# Altium PCB верхняя плата версия 5.PcbDoc (part 1 of 2)
Units mm, origin at the board's own origin, x right, y up, seen from the top; angles counter-clockwise.
Board outline 53 x 45 mm, 4 copper layers (Top Layer, Layer 1, Layer 2, Bottom Layer), stack 1.083 mm thick; 122 components, 141 nets, 822 pads, 327 vias.
Unrouted connection lines stored in the file: 3.
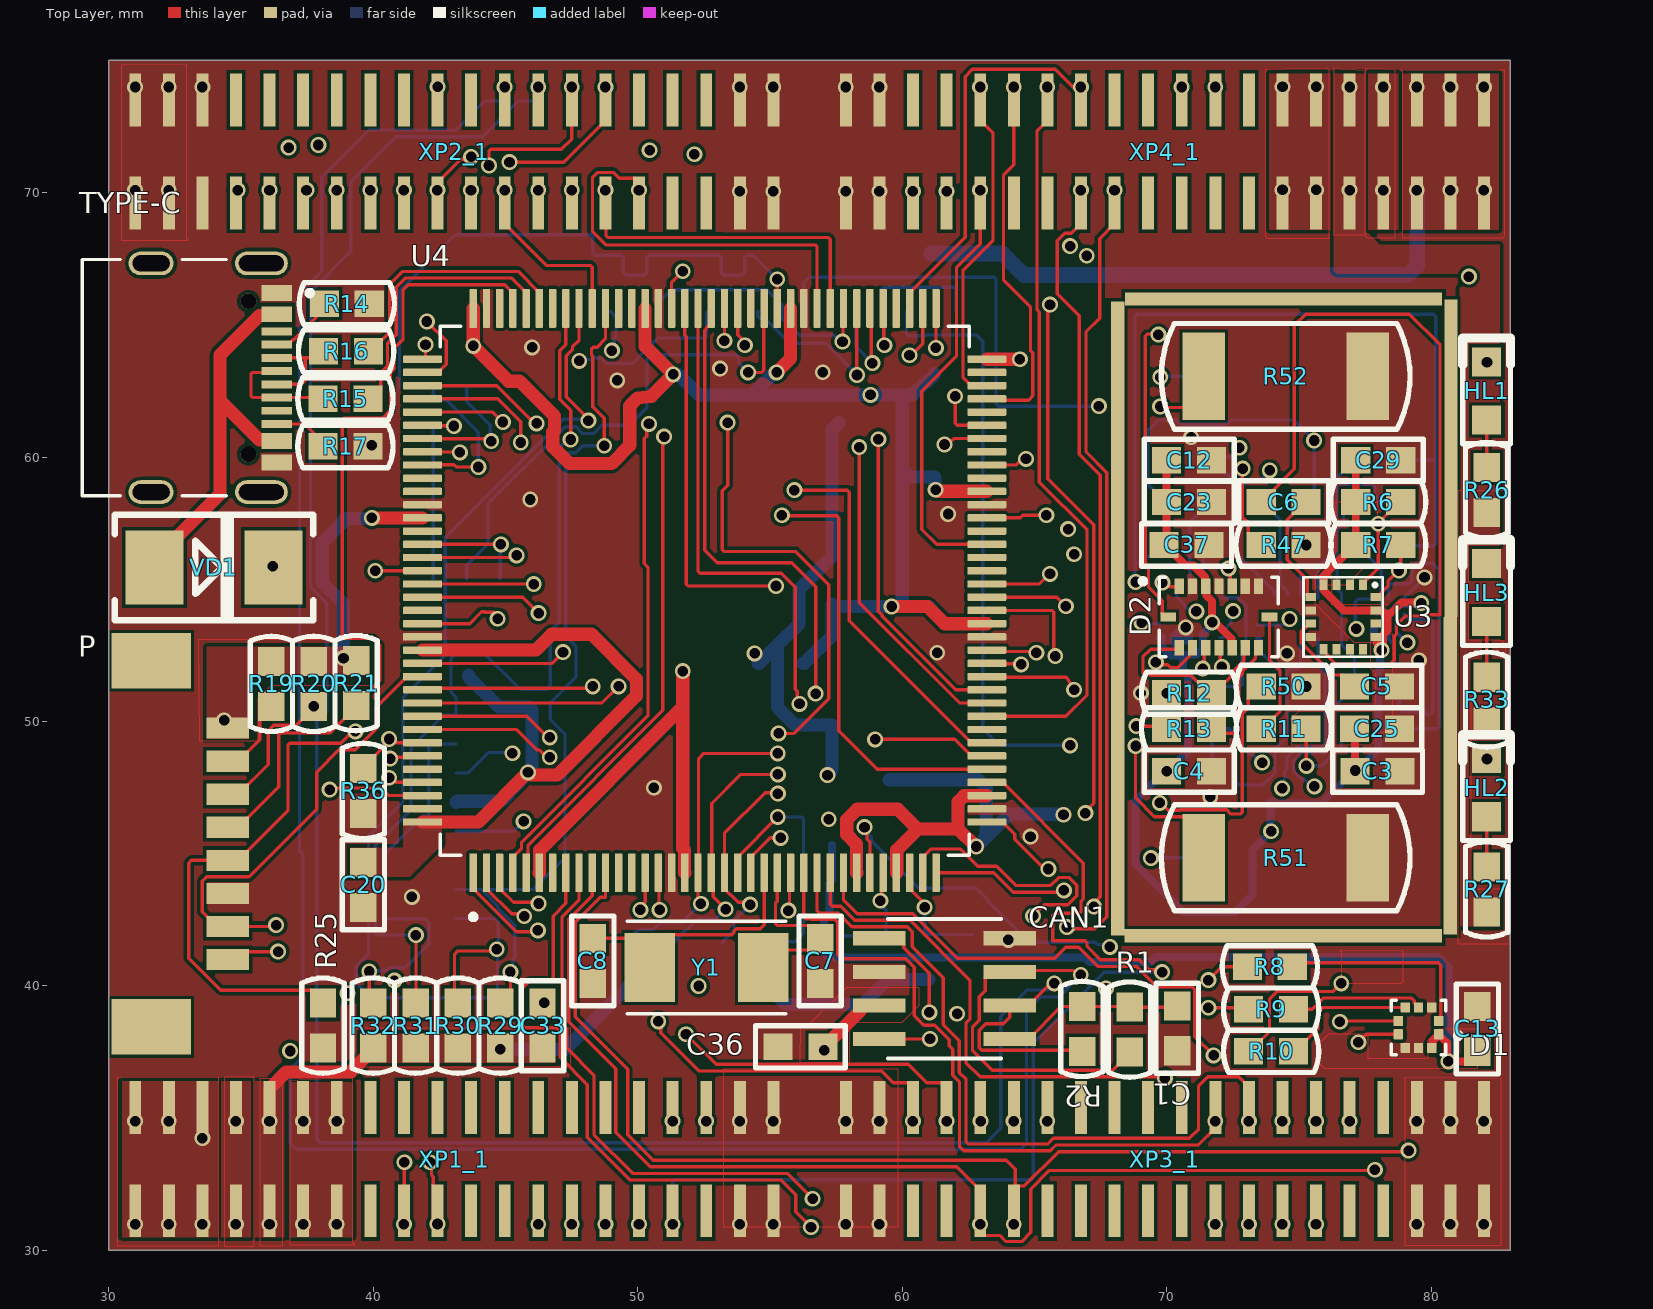
[diagram p0: Top Layer view]
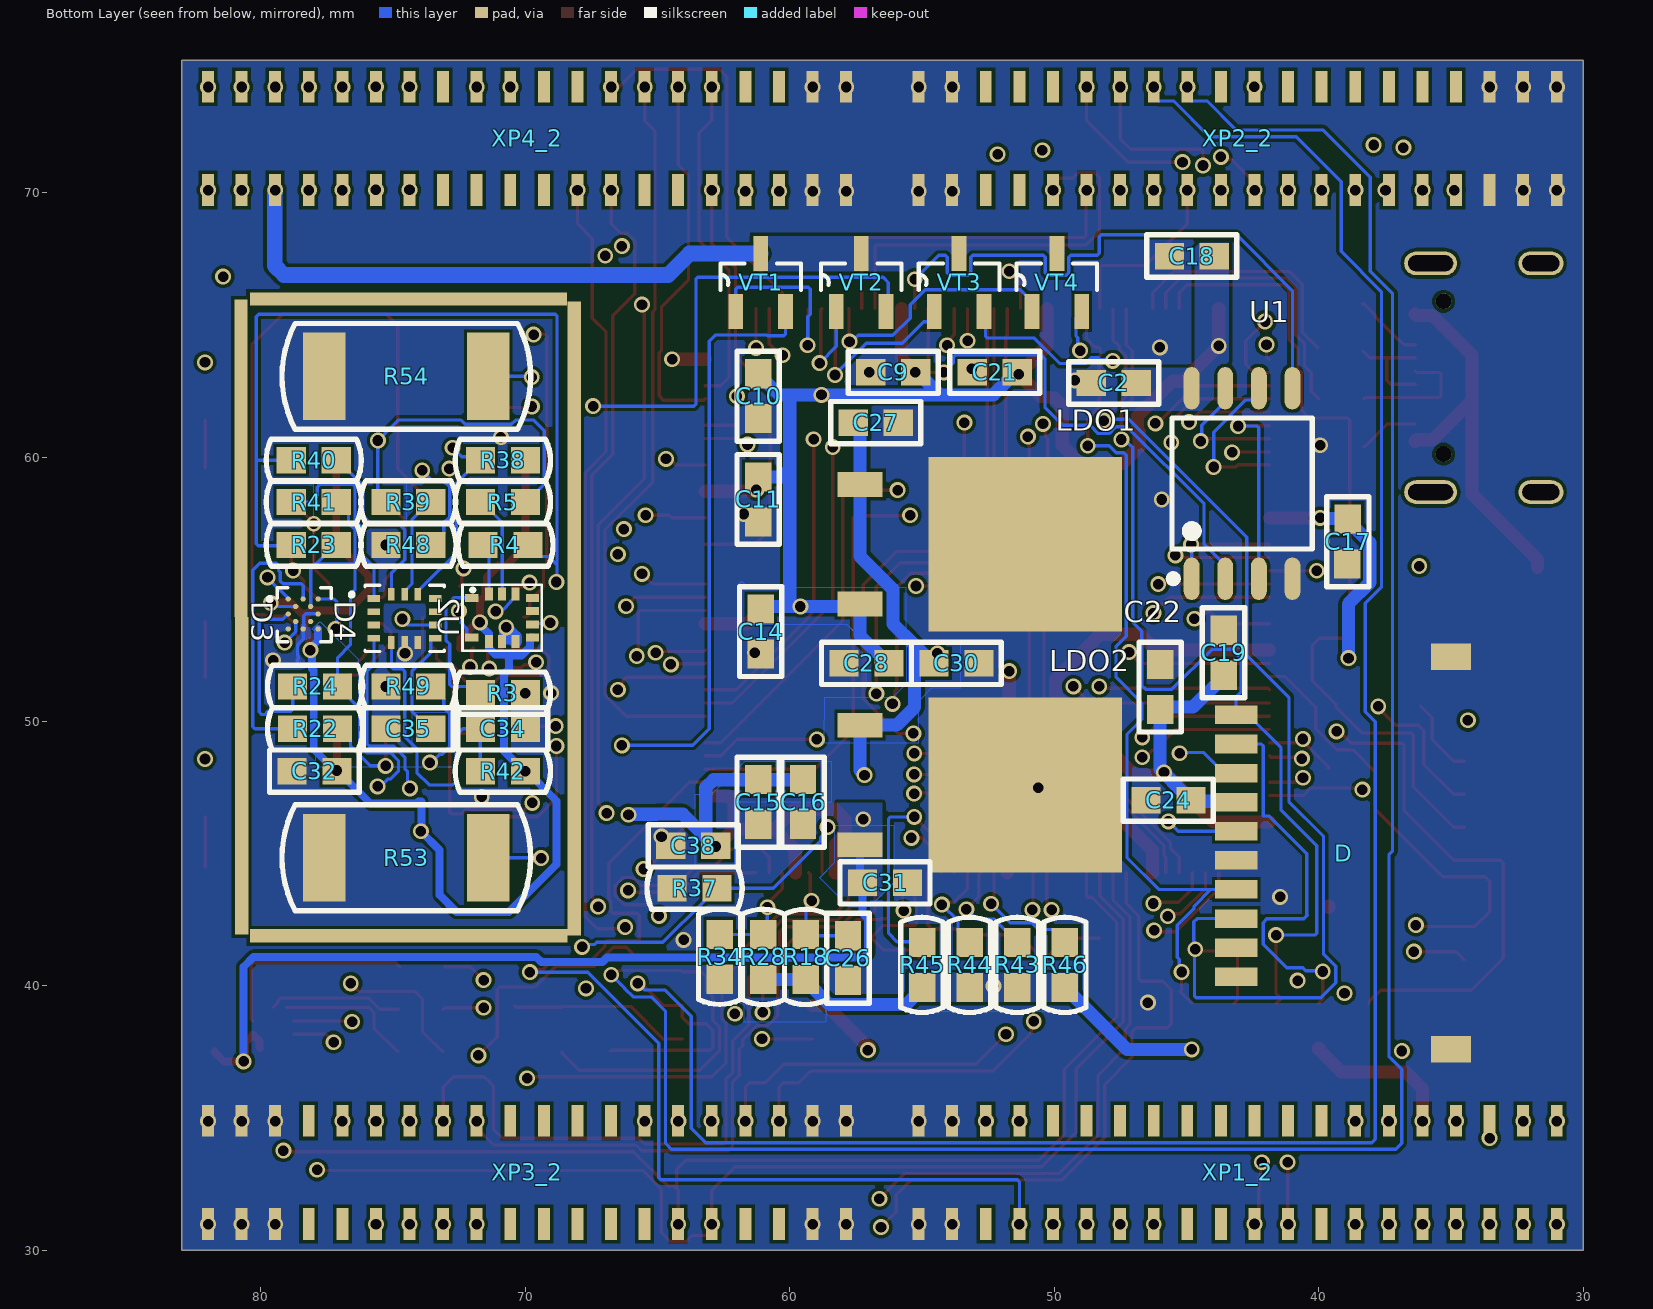
[diagram p1: Bottom Layer view, seen from below]
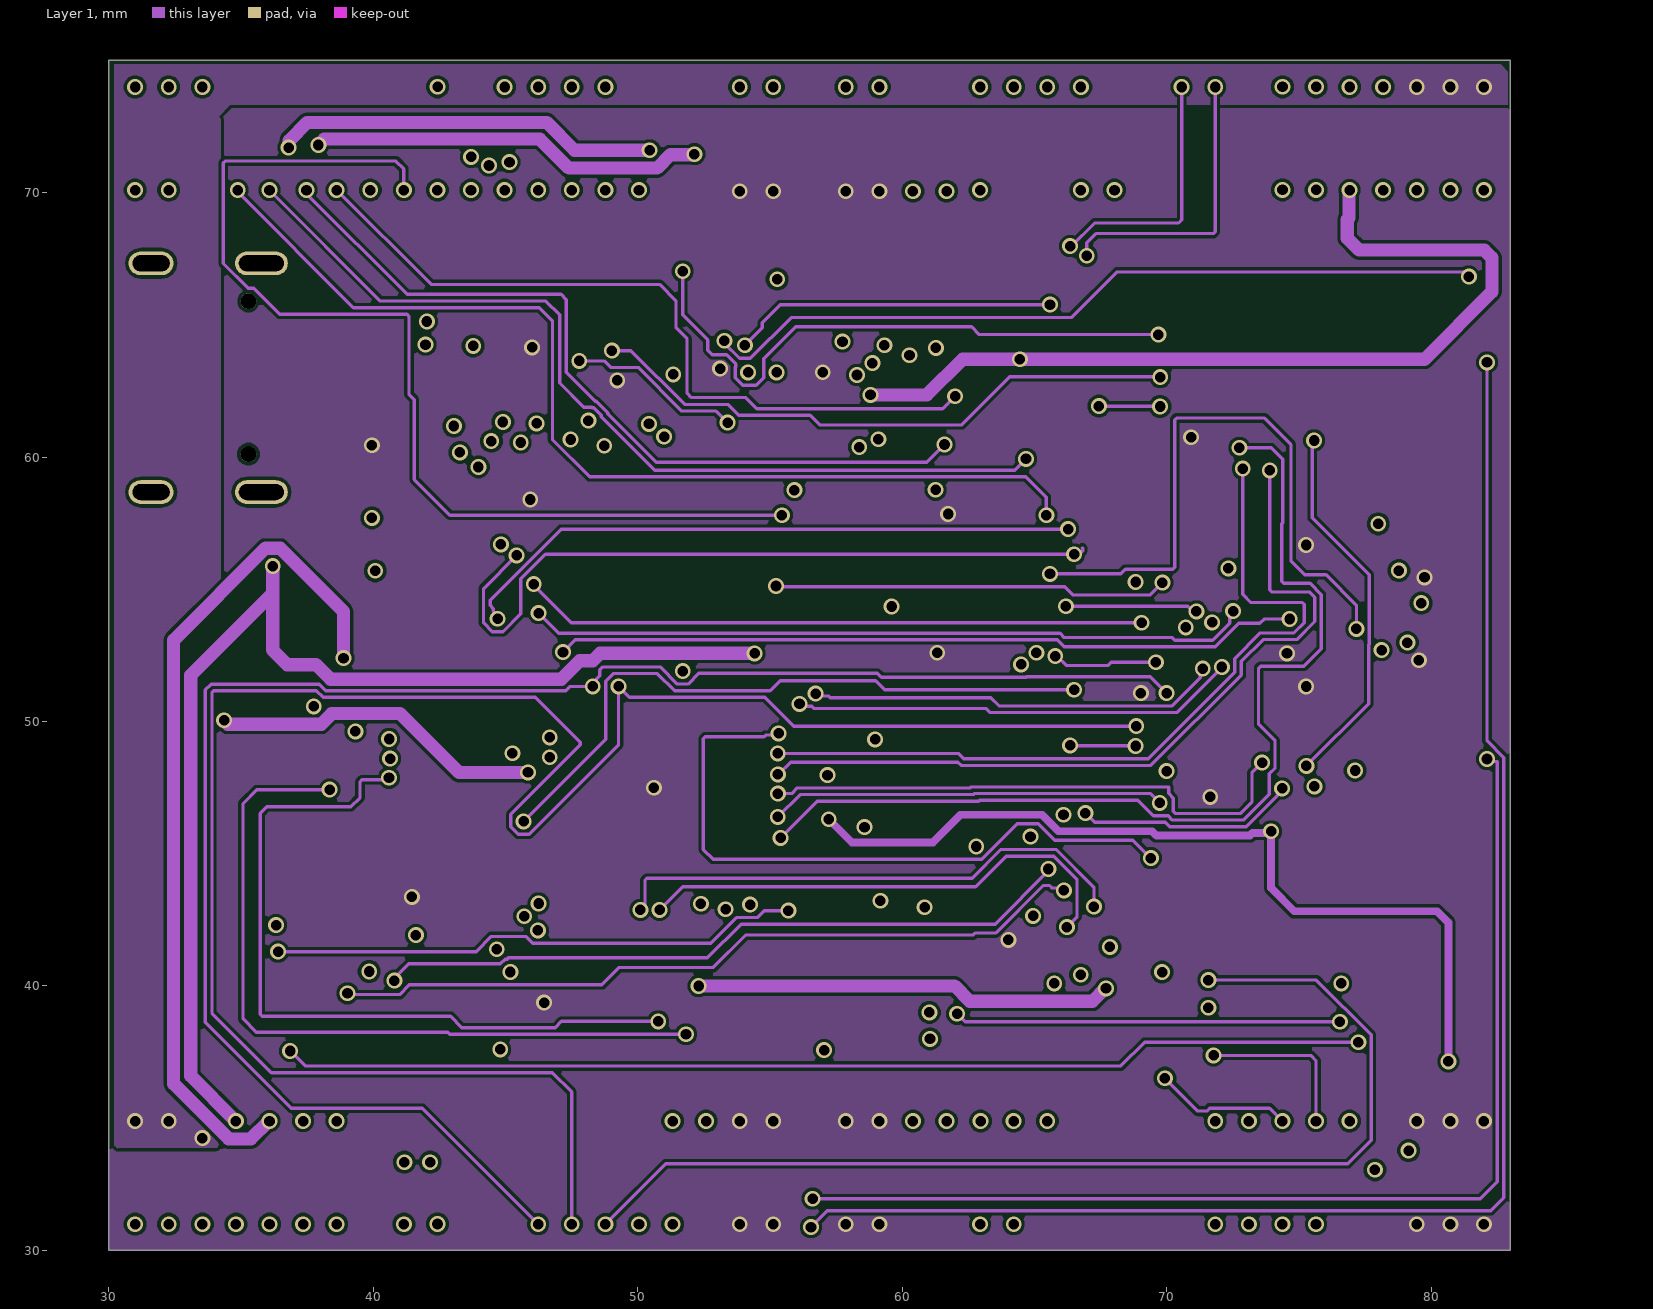
[diagram p2: Layer 1]
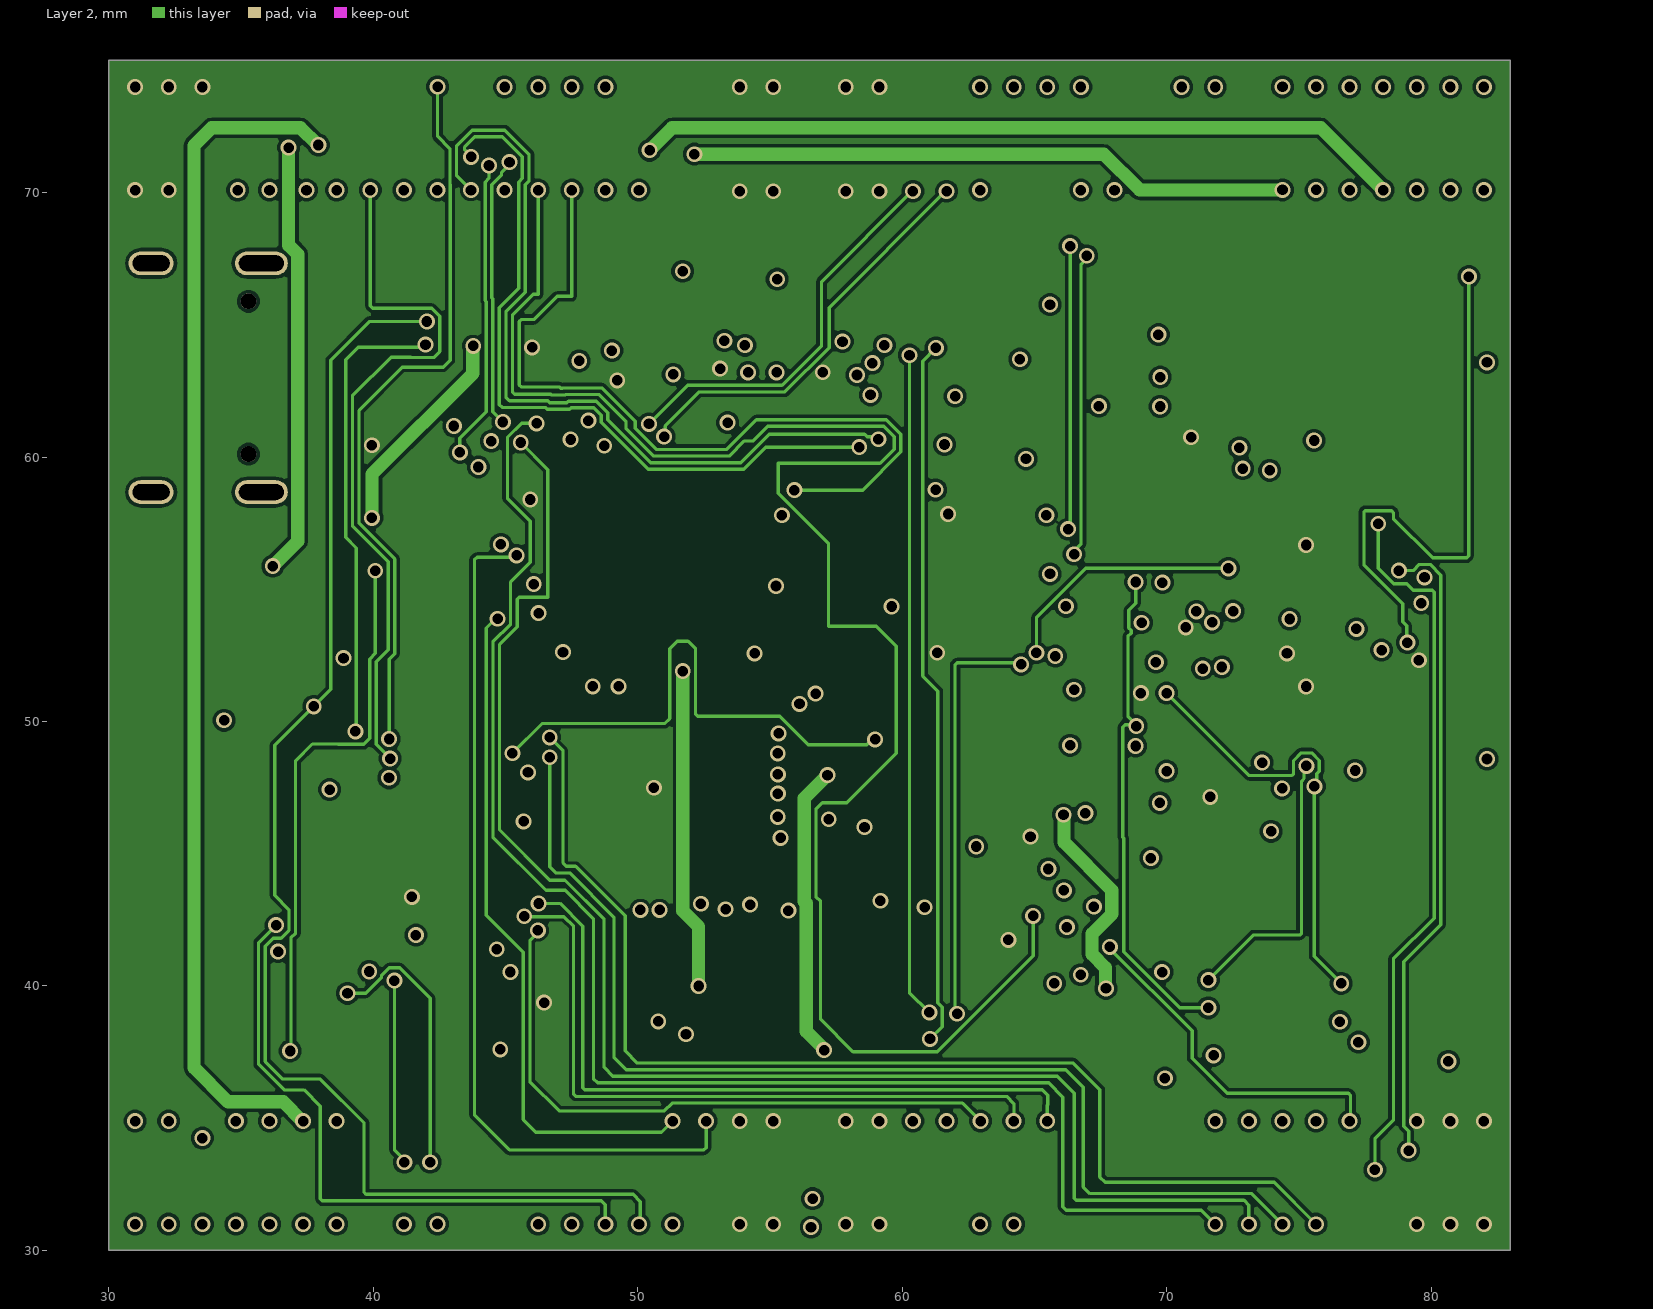
[diagram p3: Layer 2]
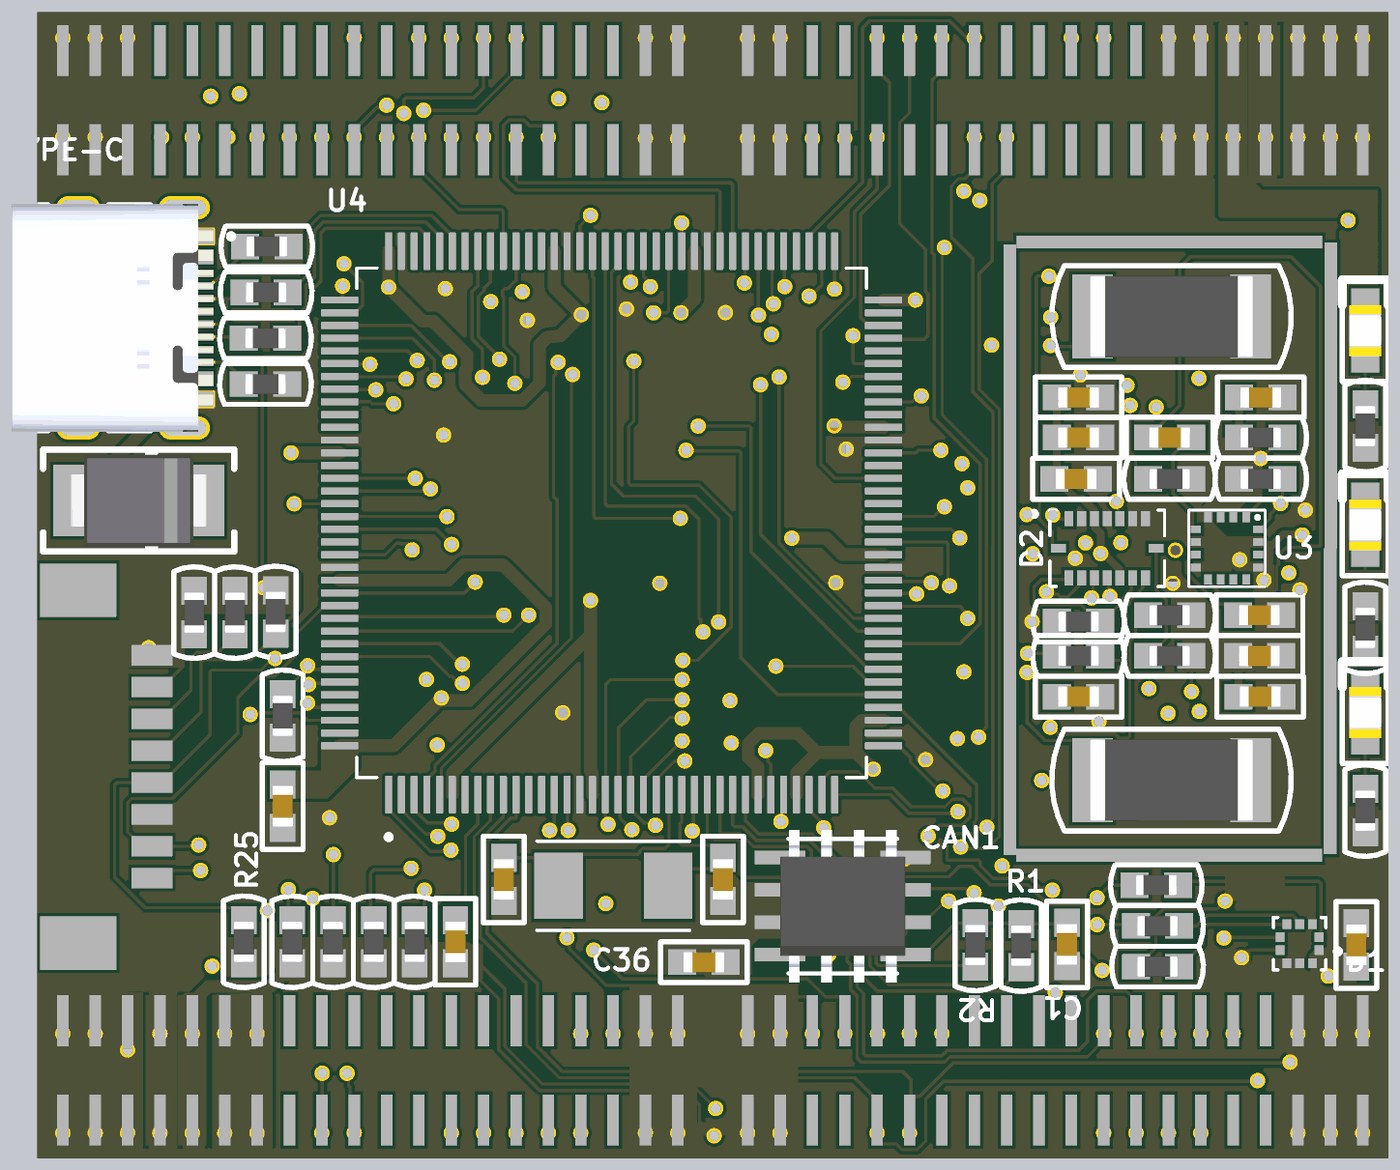
[diagram p5: 3D render of the assembled board from above, using the file's embedded part models]
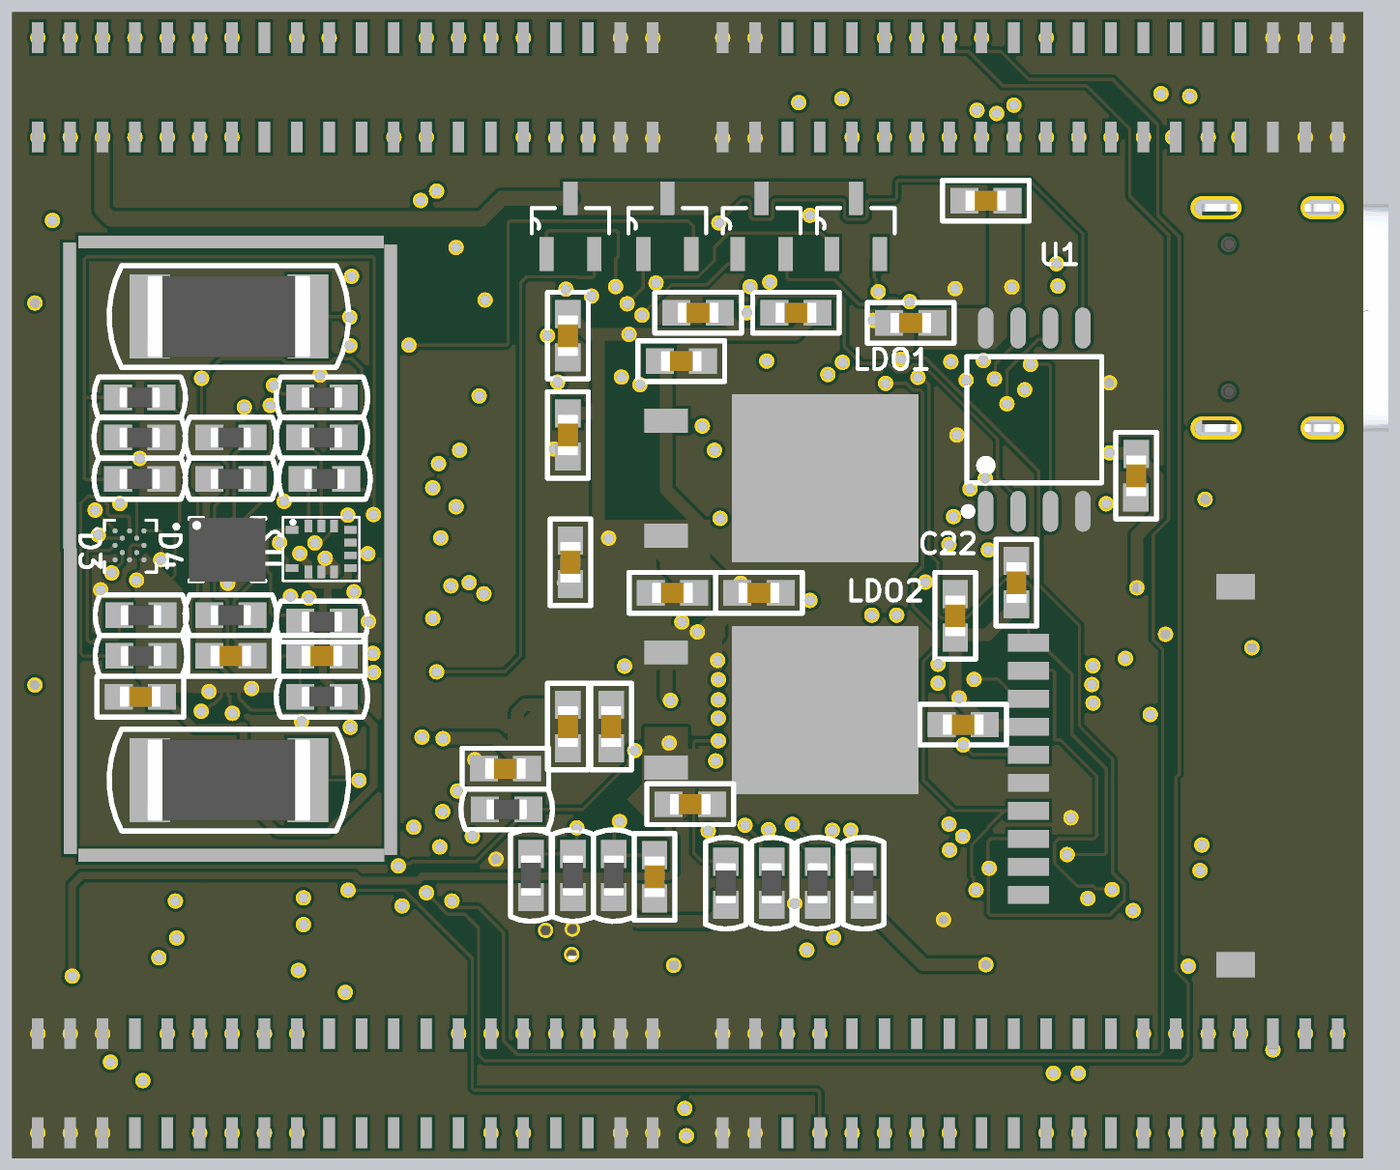
[diagram p6: 3D render of the assembled board from below, using the file's embedded part models]

## Layer stack, top to bottom
Top Solder: solder mask 0.0102, Solder Resist, Dk 3.5
Top Layer: signal copper 0.0356
Dielectric 2: prepreg 0.0711, PP-006, Dk 4.1
Layer 1: signal copper 0.035
Dielectric 1: core 0.8, FR4 Tg135, Dk 4.5
Layer 2: signal copper 0.035
Dielectric 3: prepreg 0.0711, PP-006, Dk 4.1
Bottom Layer: signal copper 0.0356
Bottom Solder: solder mask 0.0102, Solder Resist, Dk 3.5

## Board outline
30,30 83,30 83,75 30,75

## Design rules (kind name [scope] priority, off if disabled: settings)
Clearance [All] p1: gap=0.125 ignorepadtopadclearanceinfootprint=TRUE except(0.1: Arc-SMDPad Track-SMDPad)
ComponentClearance [All] p1: gap=0 collisioncheckmode=3 verticalgap=0 showdistances=FALSE
MinimumSolderMaskSliver [All] p1: minsoldermaskwidth=0
PolygonConnect [All] p1: connectstyle=Direct reliefconductorwidth=0.254 reliefentries=4 polygonreliefangle="90 Angle" airgapwidth=0.254
RoutingVias [All] p1: holewidth=0.4 width=0.6 viastyle="Through Hole" minholewidth=0.4 minwidth=0.6 maxholewidth=0.4 maxwidth=0.6
SolderMaskExpansion [All] p1: expansion=0 istentingtop=FALSE
Width Width_7 [InNet('VCC')] p1: maxlimit=0.6 minlimit=0.6 preferedwidth=0.6 minimp=50.000000 maximp=50.000000 favimp=50.000000
Width Width_6 [InNet('NetTYPE-C_A4_B9')] p2: maxlimit=0.5 minlimit=0.254 preferedwidth=0.5 minimp=50.000000 maximp=50.000000 favimp=50.000000
Width Width_5 [InNet('3V3')] p3: maxlimit=0.5 minlimit=0.5 preferedwidth=0.5 minimp=50.000000 maximp=50.000000 favimp=50.000000
Width Width_4 [InNet('GND')] p4: maxlimit=0.5 minlimit=0.125 preferedwidth=0.5 midlayer1_minwidth=0.5 midlayer2_minwidth=0.5 minimp=50.000000 maximp=50.000000 favimp=50.000000
Width Width_3 [InNet('5V')] p5: maxlimit=0.5 minlimit=0.5 preferedwidth=0.5 minimp=50.000000 maximp=50.000000 favimp=50.000000
Width Width_2 [InNet('4V2')] p6: maxlimit=0.5 minlimit=0.5 preferedwidth=0.5 minimp=50.000000 maximp=50.000000 favimp=50.000000
Width Width_1 [InNet('3V3_SEN')] p7: maxlimit=0.3 minlimit=0.125 preferedwidth=0.3 midlayer1_minwidth=0.3 midlayer2_minwidth=0.3 minimp=50.000000 maximp=50.000000 favimp=50.000000
Width [All] p8: maxlimit=1 minlimit=0.125 preferedwidth=0.125 minimp=50.000000 maximp=50.000000 favimp=50.000000
28 further rules are at their usual default settings.

## Components (designator, comment, footprint, x,y, rotation, side; value= is the part's Value field where it differs from the comment)
C1 "47 nF" C0603#1 70.4,38.4 r90 top
C2 "100 nF" C0603#1 47.75,62.8 r180 bottom
C3 "100 nF" C0603#1 77.975,48.125 r180 top
C4 "100 nF" C0603#1 70.85,48.125 r180 top
C5 "4.7 uF" C0603#1 77.95,51.325 r180 top
C6 "0.22 uF" C0603#1 74.425,58.3 r180 top
C7 "22 pF" C0603#1 56.9,40.95 r90 top
C8 "22 pF" C0603#1 48.3,40.95 r90 top
C9 "100 nF" C0603#1 56.088,63.2 r180 bottom
C10 "100 nF" C0603#1 61.2,62.3 r90 bottom
C11 "100 nF" C0603#1 61.2,58.4 r90 bottom
C12 "100 nF" C0603#1 70.85,59.875 r180 top
C13 "100 nF" C0603#1 81.75,38.375 r270 top
C14 "100 nF" C0603#1 61.1,53.4 r90 bottom
C15 "100 nF" C0603#1 61.2,46.95 r90 bottom
C16 "100 nF" C0603#1 59.5,46.95 r90 bottom
C17 "100 nF" C0603#2 38.9,56.8 r90 bottom
C18 "100 nF" C0603#1 44.8,67.6 r180 bottom
C19 "100 nF" C0603#1 43.6,52.6 r270 bottom
C20 "100 nF" C0603#1 39.625,43.825 r90 top
C21 "100 nF" C0603#1 52.25,63.2 r180 bottom
C22 "100 nF" C0603#1 46,51.3 r270 bottom
C23 "100 nF" C0603#1 70.85,58.3 r180 top
C24 "100 nF" C0603#1 45.688,47.027 r180 bottom
C25 "100 nF" C0603#1 77.95,49.725 r180 top
C26 "100 nF" C0603#1 57.8,41.05 r90 bottom
C27 "0.1 uF" C0603#1 56.75,61.3 r0 bottom
C28 "10 uF" C0603#1 57.1,52.2 r180 bottom
C29 "100 nF" C0603#1 78,59.875 r180 top
C30 "0.1 uF" C0603#1 53.7,52.2 r0 bottom
C31 "10 uF" C0603#1 56.4,43.9 r0 bottom
C32 "100 nF" C0603#1 77.975,48.125 r180 bottom
C33 "0.1 uF" C0603#1 46.4,38.5 r270 top
C34 "100 nF" C0603#1 70.85,49.725 r0 bottom
C35 "100 nF" C0603#1 74.425,49.725 r180 bottom
C36 "100 nF" C0603#1 56.15,37.7 r180 top
C37 "100 nF" C0603#1 70.75,56.675 r180 top
C38 "100 nF" C0603#1 63.65,45.3 r180 bottom
CAN1 "TJA1040T" SO-8_S 61.6,39.9 r0 top
D "D" GTFP08131Y2HR 35.8,45.4 r270 bottom locked
D1 "BMP388" PQFN50P200X200X80-10N 79.525,38.425 r180 top
D2 "BMI088" PQFN50P450X300X100-16N 71.975,53.95 r0 top
D3 "BMM150" XDCR_BMM150 78.365,54.031 r180 bottom
D4 "BMI270" XDCR_BMI270 74.563,53.9 r180 bottom
HL1 "" LD0805 82.1,62.5 r90 top
HL2 "" LD0805 82.1,47.5 r90 top
HL3 "" LD0805 82.1,54.875 r90 top
LDO1 "КФ1158Н" TO228P972X240-3N 51.252,56.7 r270 bottom
LDO2 "КФ1158Н" TO228P972X240-3N 51.252,47.6 r270 bottom
P "Header 1x8" "PicoBlade 8pin" 34.5,45.385 r270 top
R1 "60Om" R0603 68.6,38.35 r90 top
R2 "60 Om" R0603 66.8,38.375 r90 top
R3 "0" R0603 70.85,51.075 r180 bottom
R4 "0" R0603 70.75,56.675 r180 bottom
R5 "0" R0603 70.85,58.3 r180 bottom
R6 "2.2k" R0603 78,58.3 r180 top
R7 "2.2k" R0603 78,56.675 r180 top
R8 "0" R0603 73.9,40.725 r0 top
R9 "0" R0603 73.95,39.125 r0 top
R10 "0" R0603 73.95,37.525 r0 top
R11 "0" R0603 74.425,49.725 r180 top
R12 "0" R0603 70.85,51.075 r180 top
R13 "0" R0603 70.85,49.725 r0 top
R14 "5,1 кОм" R0603 39,65.8 r180 top
R15 "68" R0603 38.95,62.2 r0 top
R16 "68" R0603 38.975,64 r0 top
R17 "5,1 кОм" R0603 38.95,60.4 r0 top
R18 "47 Ом" R0603 59.4,41.1 r90 bottom
R19 "47 кОм" R0603 36.15,51.425 r90 top
R20 "47 кОм" R0603 37.75,51.425 r90 top
R21 "47 кОм" R0603 39.35,51.45 r90 top
R22 "0" R0603 77.95,49.725 r0 bottom
R23 "0" R0603 78,56.675 r180 bottom
R24 "0" R0603 77.95,51.325 r180 bottom
R25 "47 кОм" R0603 38.1,38.5 r270 top
R26 "220" R0603 82.1,58.75 r270 top
R27 "220" R0603 82.1,43.65 r270 top
R28 "0" R0603 61,41.1 r270 bottom
R29 "47 кОм" R0603 44.8,38.5 r90 top
R30 "47 кОм" R0603 43.2,38.5 r90 top
R31 "47 кОм" R0603 41.6,38.5 r90 top
R32 "47 кОм" R0603 40,38.5 r90 top
R33 "220" R0603 82.1,50.825 r270 top
R34 "0" R0603 62.65,41.103 r90 bottom
R36 "10 kOm" R0603 39.625,47.375 r270 top
R37 "0" R0603 63.6,43.7 r0 bottom
R38 "10 кОм" R0603 70.85,59.875 r180 bottom
R39 "0" R0603 74.425,58.3 r180 bottom
R40 "0" R0603 78,59.875 r180 bottom
R41 "0" R0603 78,58.3 r0 bottom
R42 "0" R0603 70.85,48.125 r180 bottom
R43 "Resistor" R0603 51.4,40.8 r270 bottom
R44 "Resistor" R0603 53.2,40.8 r270 bottom
R45 "Resistor" R0603 55,40.8 r270 bottom
R46 "Resistor" R0603 49.6,40.8 r270 bottom
R47 "Resistor_0,25W" R0603 74.425,56.675 r0 top
R48 "Resistor_0,25W" R0603 74.425,56.675 r0 bottom
R49 "Resistor_0,25W" R0603 74.425,51.325 r0 bottom
R50 "Resistor_0,25W" R0603 74.425,51.325 r0 top
R51 "Resistor_0,25W" R2512 74.5,44.85 r0 top
R52 "Resistor_0,25W" R2512 74.5,63.05 r0 top
R53 "Resistor_0,25W" R2512 74.5,44.85 r0 bottom
R54 "Resistor_0,25W" R2512 74.5,63.05 r0 bottom
TYPE-C "TYPE-C-31-M-12" HRO_TYPE-C-31-M-12 31.6,63 r270 top
U1 "W25Q128FVSIG" SOIC127P790X216-8N 42.9,59 r90 bottom
U2 "QMI8658" QMI8658 70.95,53.875 r0 bottom
U3 "QMC5883L" QMC5883L 76.675,54.025 r0 top
U4 "K1921BK01T2" QFP50P2200X2200X160-144N 52.53,54.95 r90 top
VD1 "" DO-214AA 33.975,55.825 r0 top
VT1 "MOSFET-N" SOT95P240X112-3N 61.1,66.6 r90 bottom
VT2 "MOSFET-N" SOT95P240X112-3N 57.3,66.6 r90 bottom
VT3 "MOSFET-N" SOT95P240X112-3N 53.6,66.6 r90 bottom
VT4 "MOSFET-N" SOT95P240X112-3N 49.9,66.6 r90 bottom
XP1_1 "PLLD-1.27-40S" "Headr 2x20 male" 42.851,33.447 r90 top locked
XP1_2 "PLLD-1.27-40S" "Headr 2x20 Female" 41.962,32.82 r90 bottom locked
XP2_1 "PLLD-1.27-40S" "Headr 2x20 male" 42.851,71.547 r90 top
XP2_2 "PLLD-1.27-40S" "Headr 2x20 Female" 41.962,71.92 r90 bottom
XP3_1 "PLLD-1.27-40S" "Headr 2x20 male" 69.721,33.447 r90 top locked
XP3_2 "PLLD-1.27-40S" "Headr 2x20 Female" 68.832,32.82 r90 bottom locked
XP4_1 "PLLD-1.27-40S" "Headr 2x20 male" 69.721,71.547 r90 top
XP4_2 "PLLD-1.27-40S" "Headr 2x20 Female" 68.832,71.92 r90 bottom
Y1 "8 мгц" XTAL_ABM7-8.000MHZ-8-R80-D2Y-T 52.6,40.7 r0 top

## Footprints (in the part's own frame and the unit in brackets; to place one, negate y for a bottom-side part, rotate by r counter-clockwise, add the part's x,y. Pads: shape width x height; smd on the part's side, far side on the other; paste and mask are expansions set on the pad)
C0603#1 [mm] "1608M"
  rect 1.1x1 smd: 1(-0.85,0) 2(0.85,0)
  silkscreen extent -1.7,-0.8 1.7,0.8, body extent -0.8,-0.4 0.8,0.4, height 0.91
C0603#2 [mm] "1608M"
  rect 1.1x1 smd: 1(-0.85,0.018) 2(0.85,0)
  silkscreen extent -1.7,-0.8 1.7,0.8, body extent -0.8,-0.4 0.8,0.4, height 0.91
DO-214AA [mm] "(SMB) Low profile package"
  rect 2.2x2.8 smd: 1(-2.25,0) 2(2.25,0)
  silkscreen extent -3.75,-2 3.75,2, body extent -2.7,-1.8 2.7,1.8, height 2.3
GTFP08131Y2HR [mm]
  rect 0.7x1.6 smd: 1(-4.85,-7.325) 2(-3.75,-7.325) 3(-2.65,-7.325) 4(-1.55,-7.325) 5(-0.45,-7.325) 6(0.65,-7.325) 7(1.75,-7.325) 8(2.85,-7.325) 9(3.95,-7.325) CD(5.05,-7.325)
  rect 1x1.5 smd: S1(-7.05,0.8) S2(7.8,0.8)
"Headr 2x20 Female" [mm]
  rect 1.2x0.45 smd: 1(-1.82,-10.962) 2(2.08,-10.962) 3(-1.82,-9.692) 4(2.08,-9.692) 5(-1.82,-8.422) 6(2.08,-8.422) 7(-1.82,-7.152) 8(2.08,-7.152) 9(-1.82,-5.882) 10(2.08,-5.882) 11(-1.82,-4.612) 12(2.08,-4.612) 13(-1.82,-3.342) 14(2.08,-3.342) 15(-1.82,-2.072) 16(2.08,-2.072) 17(-1.82,-0.802) 18(2.08,-0.802) 19(-1.82,0.468) 20(2.08,0.468) 21(-1.82,1.738) 22(2.08,1.738) 23(-1.82,3.008) 24(2.08,3.008) 25(-1.82,4.278) 26(2.08,4.278) 27(-1.82,5.548) 28(2.08,5.548) 29(-1.82,6.818) 30(2.08,6.818) 31(-1.82,8.088) 32(2.08,8.088) 33(-1.82,9.358) 34(2.08,9.358) 35(-1.82,10.628) 36(2.08,10.628) 37(-1.82,11.898) 38(2.08,11.898) 39(-1.82,13.168) 40(2.08,13.168)
"Headr 2x20 male" [mm]
  rect 2x0.45 smd: 1(-1.947,11.851) 2(1.953,11.851) 3(-1.947,10.581) 4(1.953,10.581) 5(-1.947,9.311) 6(1.953,9.311) 7(-1.947,8.041) 8(1.953,8.041) 9(-1.947,6.771) 10(1.953,6.771) 11(-1.947,5.501) 12(1.953,5.501) 13(-1.947,4.231) 14(1.953,4.231) 15(-1.947,2.961) 16(1.953,2.961) 17(-1.947,1.691) 18(1.953,1.691) 19(-1.947,0.421) 20(1.953,0.421) 21(-1.947,-0.849) 22(1.953,-0.849) 23(-1.947,-2.119) 24(1.953,-2.119) 25(-1.947,-3.389) 26(1.953,-3.389) 27(-1.947,-4.659) 28(1.953,-4.659) 29(-1.947,-5.929) 30(1.953,-5.929) 31(-1.947,-7.199) 32(1.953,-7.199) 33(-1.947,-8.469) 34(1.953,-8.469) 35(-1.947,-9.739) 36(1.953,-9.739) 37(-1.947,-11.009) 38(1.953,-11.009) 39(-1.947,-12.279) 40(1.953,-12.279)
HRO_TYPE-C-31-M-12 [mm]
  rect 0.6x1.14 smd mask+0.05: A1_B12(-3.2,4.75) A4_B9(-2.4,4.75) B1_A12(3.2,4.75) B4_A9(2.4,4.75)
  rect 0.3x1.14 smd mask+0.05: A5(-1.25,4.75) A6(-0.25,4.75) A7(0.25,4.75) A8(1.25,4.75) B5(1.75,4.75) B6(0.75,4.75) B7(-0.75,4.75) B8(-1.75,4.75)
  oval 0.9x2 hole 0.6 slot 1.7 at 90 deg: S1(-4.325,4.17) S2(4.325,4.17)
  oval 0.9x1.7 hole 0.6 slot 1.4 at 90 deg: S3(-4.325,0) S4(4.325,0)
  round 0.6 hole 0.6 unplated: ""(-2.89,3.68) ""(2.89,3.68)
  silkscreen extent -4.47,-2.6 4.47,6.1, body extent -4.47,-2.6 4.47,5.31, height 3.31
LD0805 [mm]
  rect 1.1x1.1 smd: 1(-1.1,0) 2(1.1,0)
  silkscreen extent -2,-0.9 2,0.9, body extent -1,-0.62 1,0.63, height 0.73
"PicoBlade 8pin" [mm]
  rect 0.8x1.6 smd: 1(-4.365,0) 2(-3.115,0) 3(-1.865,0) 4(-0.615,0) 5(0.635,0) 6(1.885,0) 7(3.135,0) 8(4.385,0)
  rect 2.1x3 smd: S(-6.915,-2.9) S(6.935,-2.9)
PQFN50P200X200X80-10N [mm]
  rrect9% 0.35x0.38 smd: 1(-0.765,0.25) 2(-0.765,-0.25) 3(-0.5,-0.765) 4(0,-0.765) 5(0.5,-0.765) 6(0.765,-0.25) 7(0.765,0.25) 8(0.5,0.765) 9(0,0.765) 10(-0.5,0.765)
  silkscreen extent -1.6,-1.03 1.03,1.03
PQFN50P450X300X100-16N [mm]
  rect 0.35x0.59 smd: 1(-1.5,1.165) 2(-1,1.165) 3(-0.5,1.165) 4(0,1.165) 5(0.5,1.165) 6(1,1.165) 7(1.5,1.165) 9(1.5,-1.165) 10(1,-1.165) 11(0.5,-1.165) 12(0,-1.165) 13(-0.5,-1.165) 14(-1,-1.165) 15(-1.5,-1.165)
  rect 0.59x0.35 smd: 8(1.915,0) 16(-1.915,0)
  silkscreen extent -2.97,-1.5 2.25,1.5
QFP50P2200X2200X160-144N [mm]
  rrect25% 1.47x0.28 smd: 1(-10.67,8.75) 2(-10.67,8.25) 3(-10.67,7.75) 4(-10.67,7.25) 5(-10.67,6.75) 6(-10.67,6.25) 7(-10.67,5.75) 8(-10.67,5.25) 9(-10.67,4.75) 10(-10.67,4.25) 11(-10.67,3.75) 12(-10.67,3.25) 13(-10.67,2.75) 14(-10.67,2.25) 15(-10.67,1.75) 16(-10.67,1.25) 17(-10.67,0.75) 18(-10.67,0.25) 19(-10.67,-0.25) 20(-10.67,-0.75) 21(-10.67,-1.25) 22(-10.67,-1.75) 23(-10.67,-2.25) 24(-10.67,-2.75) 25(-10.67,-3.25) 26(-10.67,-3.75) 27(-10.67,-4.25) 28(-10.67,-4.75) 29(-10.67,-5.25) 30(-10.67,-5.75) 31(-10.67,-6.25) 32(-10.67,-6.75) 33(-10.67,-7.25) 34(-10.67,-7.75) 35(-10.67,-8.25) 36(-10.67,-8.75) 73(10.67,-8.75) 74(10.67,-8.25) 75(10.67,-7.75) 76(10.67,-7.25) 77(10.67,-6.75) 78(10.67,-6.25) 79(10.67,-5.75) 80(10.67,-5.25) 81(10.67,-4.75) 82(10.67,-4.25) 83(10.67,-3.75) 84(10.67,-3.25) 85(10.67,-2.75) 86(10.67,-2.25) 87(10.67,-1.75) 88(10.67,-1.25) 89(10.67,-0.75) 90(10.67,-0.25) 91(10.67,0.25) 92(10.67,0.75) 93(10.67,1.25) 94(10.67,1.75) 95(10.67,2.25) 96(10.67,2.75) 97(10.67,3.25) 98(10.67,3.75) 99(10.67,4.25) 100(10.67,4.75) 101(10.67,5.25) 102(10.67,5.75) 103(10.67,6.25) 104(10.67,6.75) 105(10.67,7.25) 106(10.67,7.75) 107(10.67,8.25) 108(10.67,8.75)
  rrect25% 0.28x1.47 smd: 37(-8.75,-10.67) 38(-8.25,-10.67) 39(-7.75,-10.67) 40(-7.25,-10.67) 41(-6.75,-10.67) 42(-6.25,-10.67) 43(-5.75,-10.67) 44(-5.25,-10.67) 45(-4.75,-10.67) 46(-4.25,-10.67) 47(-3.75,-10.67) 48(-3.25,-10.67) 49(-2.75,-10.67) 50(-2.25,-10.67) 51(-1.75,-10.67) 52(-1.25,-10.67) 53(-0.75,-10.67) 54(-0.25,-10.67) 55(0.25,-10.67) 56(0.75,-10.67) 57(1.25,-10.67) 58(1.75,-10.67) 59(2.25,-10.67) 60(2.75,-10.67) 61(3.25,-10.67) 62(3.75,-10.67) 63(4.25,-10.67) 64(4.75,-10.67) 65(5.25,-10.67) 66(5.75,-10.67) 67(6.25,-10.67) 68(6.75,-10.67) 69(7.25,-10.67) 70(7.75,-10.67) 71(8.25,-10.67) 72(8.75,-10.67) 109(8.75,10.67) 110(8.25,10.67) 111(7.75,10.67) 112(7.25,10.67) 113(6.75,10.67) 114(6.25,10.67) 115(5.75,10.67) 116(5.25,10.67) 117(4.75,10.67) 118(4.25,10.67) 119(3.75,10.67) 120(3.25,10.67) 121(2.75,10.67) 122(2.25,10.67) 123(1.75,10.67) 124(1.25,10.67) 125(0.75,10.67) 126(0.25,10.67) 127(-0.25,10.67) 128(-0.75,10.67) 129(-1.25,10.67) 130(-1.75,10.67) 131(-2.25,10.67) 132(-2.75,10.67) 133(-3.25,10.67) 134(-3.75,10.67) 135(-4.25,10.67) 136(-4.75,10.67) 137(-5.25,10.67) 138(-5.75,10.67) 139(-6.25,10.67) 140(-6.75,10.67) 141(-7.25,10.67) 142(-7.75,10.67) 143(-8.25,10.67) 144(-8.75,10.67)
  silkscreen extent -12.44,-10 10,10
QMC5883L [mm]
  rect 0.4x0.3 smd: 1(1.225,0.675) 2(1.225,0.175) 3(1.225,-0.325) 4(1.225,-0.825) 9(-1.225,-0.825) 10(-1.225,-0.325) 11(-1.225,0.175) 12(-1.225,0.675)
  rect 0.3x0.4 smd: 5(0.75,-1.3) 6(0.25,-1.3) 7(-0.25,-1.3) 8(-0.75,-1.3) 13(-0.75,1.15) 14(-0.25,1.15) 15(0.25,1.15) 16(0.75,1.15)
  silkscreen extent -1.5,-1.58 1.5,1.42
QMI8658 [mm]
  rect 0.5x0.3 smd: 1(1.075,-0.8) 4(1.075,0.7) 8(-1.225,0.7) 9(-1.225,0.2) 10(-1.225,-0.3) 11(-1.225,-0.8)
  rect 0.3x0.5 smd: 5(0.425,0.85) 6(-0.075,0.85) 7(-0.575,0.85) 12(-0.575,-0.95) 13(-0.075,-0.95) 14(0.425,-0.95)
  silkscreen extent -1.57,-1.3 1.43,1.2
R0603 [mm] "1608M"
  rect 1.1x1 smd: 1(-0.85,0) 2(0.85,0)
  silkscreen extent -1.8,-0.8 1.8,0.8, body extent -0.8,-0.4 0.8,0.4, height 0.38
R2512 [mm] "6432M"
  rect 1.6x3.3 smd: 1(-3.1,0) 2(3.1,0)
  silkscreen extent -4.7,-2 4.7,2, body extent -3.2,-1.6 3.2,1.6, height 0.7
SO-8_S [mil]
  rect 78x21 smd: 1(-97,75) 2(-97,25) 3(-97,-25) 4(-97,-75) 5(97,-75) 6(97,-25) 7(97,25) 8(97,75)
  silkscreen extent -84,-104 84,104, body extent -96,-118 96,118, height 69
SOIC127P790X216-8N [mm]
  oval 1.6x0.6 smd: 1(-3.6,1.905) 2(-3.6,0.635) 3(-3.6,-0.635) 4(-3.6,-1.905) 5(3.6,-1.905) 6(3.6,-0.635) 7(3.6,0.635) 8(3.6,1.905)
  silkscreen extent -3.82,-2.65 2.48,2.82
SOT95P240X112-3N [mil]
  rect 52x22 smd: 1(-43,37) 2(-43,-37) 3(43,0)
  silkscreen extent -11,-60 28,60
TO228P972X240-3N [mil]
  rect 37x67 smd: 1(-89,-240) 3(89,-240)
  rect 260x288 smd: 2(0,6)
XDCR_BMI270 [mm]
  rect 0.475x0.25 smd: 1(-1.163,0.75) 2(-1.163,0.25) 3(-1.163,-0.25) 4(-1.163,-0.75) 8(1.162,-0.75) 9(1.162,-0.25) 10(1.162,0.25) 11(1.162,0.75)
  rect 0.25x0.475 smd: 5(-0.5,-0.913) 6(0,-0.913) 7(0.5,-0.913) 12(0.5,0.912) 13(0,0.912) 14(-0.5,0.912)
  silkscreen extent -2.08,-1.25 1.5,1.25, body extent -1.5,-1.25 1.5,1.25, height 0.87
XDCR_BMM150 [mm]
  round 0.2 smd: A1(-0.601,0.601) A3(-0.035,0.601) A5(0.531,0.601) B2(-0.318,0.318) B4(0.248,0.318) C1(-0.601,0.035) C5(0.531,0.035) D2(-0.318,-0.248) D4(0.248,-0.248) E1(-0.601,-0.531) E3(-0.035,-0.531) E5(0.531,-0.531)
  silkscreen extent -1.38,-1.02 1.02,1.02
XTAL_ABM7-8.000MHZ-8-R80-D2Y-T [mm]
  rect 1.9x2.6 smd: 1(-2.15,0) 2(2.15,0)
  silkscreen extent -3,-1.75 3,1.75

## Part data
C1 C2 C3 C4 C5 C6 C7 C8 C9 C10 C11 C12 C13 C14 C15 C16 C17 C18 C19 C20 C21 C22 C23 C24 C25 C26 C27 C28 C29 C30 C31 C32 C33 C34 C35 C36 C37 C38: library part Capacitor, Published=18.05.2010, Publisher="Andrew Danich", Type=Конденсатор
D: library part GTFP08131Y2HR
HL1 HL2 HL3: library part Led-1, Published=03.12.2013, Publisher="Andrew Danich", Type="Индикатор единичный"
R1 R2 R3 R4 R5 R6 R7 R8 R9 R10 R11 R12 R13 R14 R15 R16 R17 R18 R19 R20 R21 R22 R23 R24 R25 R26 R27 R28 R29 R30 R31 R32 R33 R34 R36 R37 R38 R39 R40 R41 R42: library part Resistor, Published=24.03.2010, Publisher="Andrew Danich", Type=Резистор
VD1: library part Schottky
Y1: library part ABM7-8.000MHZ-8-R80-D2Y-T, "Crystal 22.1184MHz Ã‚Â±20ppm (Tol) Ã‚Â±30ppm (Stability) 18pF FUND 50Ohm 2-Pin Mini-CSMD T/R", Package=None, Availability=Unavailable, MP=ABM7-8.000MHZ-8-R80-D2Y-T, Price=None
R43 R44 R45 R46: Published=24.03.2010, Publisher="Andrew Danich", Type=Резистор
R47 R48 R49 R50 R51 R52 R53 R54: Published=19.09.2014, Publisher="Andrew Danich", Type=Резистор
VT1 VT2 VT3 VT4: Published=24.09.2010, Publisher="Andrew Danich", Type=Транзистор

## Free pads (board coordinates)
  rect 0.5x12 smd: 17(68.15,47.9) 17(68.152,59.882) 17(80.723,47.943) 17(80.75,59.95)
  rect 0.5x12 smd far side: 17(68.15,47.9) 17(68.152,59.882) 17(80.723,47.943) 17(80.75,59.95)
  rect 12x0.5 smd: 17(74.407,41.898) 17(74.418,65.977)
  rect 12x0.5 smd far side: 17(74.407,41.898) 17(74.418,65.977)

## Via types
v1: diameter 0.6, hole 0.4, Top Layer to Bottom Layer, 327 vias

## Nets (pads, with @x,y where several pads share a name; then routed paths per layer and width w, separated by ;. In a path a pad name is that pad's centre, name@x,y a point inside that pad or via, vN(x,y) a via of type N, cw(c..) or ccw(c..) an arc to the next point about the centre after c; other vN are vias at no path point)
3V3: C2.2 C9.2 C10.2 C11.2 C14.2 C15.2 C16.2 C17.2 C18.2 C19.2 C20.2 C21.2 C22.2 C24.2 C28.2 C33.2 C38.2 D.4 LDO1.3 P.1 R18.1 R19.2 R20.2 R21.2 R26.2 R27.2 R28.2 R29.1 R30.1 R31.1 R32.1 R33.2 R43.2 R44.2 R45.2 R46.2 U1.8 U4.6 U4.17 U4.30 U4.33 U4.39 U4.52 U4.62 U4.72 U4.84 U4.95 U4.108 U4.121 U4.131 U4.144 XP1_1.9 XP1_1.10 XP1_2.9 XP1_2.10 XP4_1.31 XP4_1.32 XP4_2.31 XP4_2.32 | length 271.9
  Top Layer w0.5: v1(36.077,34.893) 36.077,36.122 36.705,36.75 39.15,36.75 40,37.6 R32.1@40,37.65 ; v1@39.95,57.7 U4.121@41.86,57.7 ; U4.144@41.86,46.2 43.975,46.2 v1(45.85,48.075) 45.877,48.075 45.978,47.975 46.955,47.975 49.95,50.97 49.95,51.607 48.257,53.3 46.741,53.3 46.141,52.7 U4.131@41.86,52.7 ; U4.108@43.78,65.62 v1(43.78,64.205) 45.115,62.87 45.534,62.87 46.85,61.555 46.85,60.995 46.789,60.935 46.789,60.384 47.422,59.752 49.013,59.752 49.7,60.439 49.7,61.898 cw(c50.114,61.897) 49.703,61.944 49.993,62.235 50.509,62.291 v1(51.342,63.125) 50.28,64.187 U4.95@50.28,65.62 50.27,65.61 50.27,64.761 ; U4.6@46.28,44.28 46.29,44.29 46.29,45.139 51.651,50.5 51.7,50.5 ; v1(51.7,51.904) 51.7,50.5 ; U4.17@51.78,44.28 51.77,44.29 51.77,45.139 51.7,45.21 51.7,50.5 ; v1(55.25,63.2) 55.78,63.73 U4.84@55.78,65.62 ; U4.30@58.28,44.28 58.27,44.29 58.27,45.358 57.9,45.728 57.9,46.288 58.295,46.683 59.839,46.683 60.586,45.936 ; v1@59.6,54.35 60.95,54.35 61.6,53.7 U4.52@63.2,53.7 ; U4.33@59.78,44.28 59.79,44.29 59.79,45.139 60.586,45.936 ; v1(61.263,58.762) 61.29,58.762 61.342,58.71 63.19,58.71 U4.62@63.2,58.7 ; v1(62.8,45.275) 62.776,45.275 62.115,45.936 ; U4.39@63.2,47.2 63.19,47.19 62.341,47.19 62.115,46.964 62.115,45.936 ; U4.72@63.2,63.7 v1(64.45,63.7) ; 60.586,45.936 62.115,45.936
  Layer 1 w0.5: v1@34.35,50.05 34.5,49.9 38.03,49.9 38.43,50.3 41.014,50.3 43.239,48.075 v1(45.85,48.075) ; v1(36.077,34.893) 36.05,34.893 35.375,34.218 34.527,34.218 32.45,36.295 32.45,53.08 35.92,56.55 36.48,56.55 38.875,54.155 v1(38.875,52.4) ; v1(52.3,40) 61.98,40 62.555,39.425 67.196,39.425 67.678,39.908 v1(67.705,39.908) ; v1(58.8,62.35) 60.936,62.35 62.286,63.7 v1(64.45,63.7) 79.75,63.7 82.3,66.25 82.3,67.532 82.007,67.825 77.275,67.825 76.825,68.275 76.825,68.974 76.897,69.047 76.897,70.074 v1(76.917,70.093)
  Layer 2 w0.5: v1(39.95,57.7) 39.95,59.348 43.761,63.159 43.761,64.186 v1(43.78,64.205) ; v1(51.7,51.904) 51.7,42.845 52.3,42.245 52.3,40.025 v1@52.275,40 ; v1(66.1,46.475) 66.119,46.456 66.119,45.429 67.925,43.623 67.925,42.72 67.177,41.972 67.177,41.198 67.686,40.689 67.686,39.927 v1(67.705,39.908)
  Bottom Layer w0.5: v1(38.875,52.4) 38.875,54.448 38.068,55.255 38.068,56.768 38.9,57.6 C17.2@38.9,57.65 38.93,57.68 39.931,57.68 v1(39.95,57.7) ; D.4@43.125,46.95 43.164,46.989 44.799,46.989 C24.2@44.838,47.027 44.888,47.027 45.138,47.277 45.138,47.327 46,48.19 C22.2@46,50.45 45.9,50.55 44.75,50.55 43.6,51.7 C19.2@43.6,51.75 ; v1(44.8,37.6) 47.25,37.6 49.3,39.65 49.35,39.65 49.6,39.9 R46.2@49.6,39.95 ; v1(51.342,63.125) 51.525,63.125 52.3,62.35 54.338,62.35 ; R45.2@55,39.95 55,39.9 55.6,39.3 58.5,39.3 59.4,40.2 R18.1@59.4,40.25 R28.2@61,40.25 ; v1(55.25,63.2) 55.188,63.2 54.338,62.35 ; C28.2@56.25,52.2 56.3,52.2 57.348,53.248 LDO1.3@57.348,54.439 57.443,54.345 60,54.345 ; C16.2@59.5,47.8 C15.2@61.2,47.8 62.882,47.8 63.175,47.507 63.175,45.675 63.1,45.6 C38.2@63.1,45.55 ; C14.2@61.1,54.25 61.005,54.345 60,54.345 ; C10.2@61.2,63.15 61.2,63.1 60.95,62.85 60.9,62.85 60.4,62.35 60,62.35 ; v1(61.263,58.762) 61.243,58.782 61.243,59.232 61.225,59.25 60.293,59.25 60,59.543 ; v1(62.8,45.275) 62.825,45.275 C38.2@63.1,45.55 ; v1(66.1,46.475) 66.081,46.494 65.054,46.494 65.048,46.5 64.05,46.5 C38.2@63.1,45.55 ; 54.338,62.35 60,62.35 ; 60,54.345 60,59.543 ; 60,59.543 60,62.35
  other v1: 36.077,30.993 34.362,50.046 59.6,54.35 76.917,73.993
3V3_SEN: C3.2 C4.2 C12.2 C13.2 C23.2 C25.2 C29.2 C31.2 C32.2 C37.2 D1.1 D1.10 D2.3 D2.11 D3.B2 D3.E5 LDO2.3 R6.2 R7.2 R38.2 R42.2 U2.5 U2.8 U3.2 U3.4 U3.13 | length 120.7
  Top Layer w0.3: C12.2@70,59.875 C23.2@70,58.3 70,56.775 C37.2@69.9,56.675 69.95,56.675 70.724,55.901 71.013,55.901 71.45,55.464 71.45,55.14 71.5,55.09 71.5,54.766 71.719,54.547 v1(71.719,53.746) ; v1@71.721,53.764 71.796,53.689 71.895,53.689 72.45,53.134 72.45,52.81 D2.11@72.475,52.785 ; C25.2@77.1,49.725 77.125,49.7 C3.2@77.125,48.125 ; C29.2@77.15,59.875 R6.2@77.15,58.3 R7.2@77.15,56.675 77.1,56.675 75.925,55.5 75.925,54.971 76.696,54.2 U3.2@77.9,54.2 78.104,54.2 78.227,54.077 ; U3.4@77.9,53.2 77.95,53.2 77.95,52.956 ; v1(78.125,52.7) 78.182,52.757 78.182,53.279 78.35,53.446 78.35,53.954 78.227,54.077 ; v1(79.625,54.475) 79.6,54.5 78.875,54.5 78.452,54.077 78.35,54.077 78.227,54.077 ; D1.10@80.025,37.645 D1.10@80.025,37.66 80.05,37.685 80.05,37.92 D1.1@80.29,38.16 ; D1.1@80.29,38.175 D1.1@80.29,38.16 ; C13.2@81.75,37.525 81.75,37.501 81.4,37.151 v1(80.65,37.151) 80.593,37.209 80.593,37.857 D1.1@80.29,38.16
  Layer 1 w0.3: v1(57.225,46.302) 58.094,45.433 61.163,45.433 62.205,46.475 65.287,46.475 65.912,45.85 69.446,45.85 69.609,45.687 73.143,45.687 73.248,45.793 73.893,45.793 v1(73.95,45.85) 73.95,43.701 74.826,42.825 80.225,42.825 80.65,42.4 v1(80.65,37.151)
  Bottom Layer w0.125: D3.B2@78.683,54.349 79.345,54.349
  Bottom Layer w0.3: LDO2.3@57.348,45.339 57.348,43.998 C31.2@57.25,43.9 57.25,42.754 57.05,42.554 57.05,41.246 57.222,41.075 66.914,41.075 67.085,40.903 69.39,40.903 69.587,41.1 80.277,41.1 80.65,40.727 v1@80.65,37.275 ; U2.8@69.725,53.175 69.825,53.175 69.825,52.821 70.146,52.5 70.6,52.5 70.625,52.525 ; v1(70,48.125) 69.95,48.125 68.827,47.002 68.827,44.598 70.625,42.8 72.599,42.8 73.246,43.447 73.246,45.146 v1(73.95,45.85) 73.925,45.875 73.925,46.973 74.046,46.973 74.124,46.895 75.845,46.895 76.938,47.988 77.038,47.988 78,48.95 78,51.929 78.068,51.996 78.068,52.643 v1(78.125,52.7) 78.125,52.781 77.834,53.072 D3.E5@77.834,53.5 ; R42.2@70.05,48.125 70.809,48.884 70.809,51.795 70.625,51.979 70.625,52.525 ; v1(71.719,53.746) 71.719,53.665 71.375,53.321 71.375,52.771 71.129,52.525 70.625,52.525
  other v1: 77.127,48.149
4V2: XP1_1.11 XP1_1.12 XP1_1.13 XP1_1.14 XP1_2.11 XP1_2.12 XP1_2.13 XP1_2.14 XP4_1.27 XP4_1.28 XP4_1.29 XP4_1.30 XP4_2.27 XP4_2.28 XP4_2.29 XP4_2.30 | length 82.9
  Layer 1 w0.5: v1(37.925,71.8) 38.15,72.025 46.3,72.025 47.4,70.925 50.73,70.925 51.235,71.431 52.125,71.431 v1(52.144,71.45)
  Layer 2 w0.5: v1(37.347,34.893) 37.32,34.893 36.593,35.619 34.506,35.619 33.225,36.9 33.225,71.782 33.893,72.45 37.248,72.45 37.898,71.8 v1(37.925,71.8) ; v1(52.144,71.45) 67.624,71.45 68.975,70.1 v1(74.38,70.1)
  other v1: 37.347,30.993 38.617,30.993 38.617,34.893 75.65,70.1 74.38,74 75.65,74
5V: C27.2 C30.2 C36.1 CAN1.3 LDO1.1 LDO2.1 VD1.2 XP1_1.7 XP1_1.8 XP1_2.7 XP1_2.8 XP4_1.33 XP4_1.34 XP4_2.33 XP4_2.34 | length 135.4
  Top Layer w0.5: v1(57.05,37.575) 57.05,37.65 C36.1@57,37.7 57.05,37.7 58.396,39.046 58.396,39.248 58.412,39.265 CAN1.3@59.136,39.265
  Layer 1 w0.5: v1(34.807,34.893) 33.1,36.6 33.1,51.75 36.2,54.85 ; v1(36.2,55.875) 36.2,54.85 ; v1(36.8,71.7) 36.819,71.719 36.819,71.969 37.5,72.65 46.559,72.65 47.609,71.6 v1(50.45,71.6) ; v1(54.421,52.579) 48.579,52.579 48.3,52.3 47.805,52.3 47.105,51.6 38.387,51.6 37.837,52.15 36.75,52.15 36.2,52.7 36.2,54.85
  Layer 2 w0.5: v1(36.2,55.875) 37.145,56.82 37.145,67.667 36.8,68.012 v1(36.8,71.7) ; v1(50.45,71.6) 51.3,72.45 75.83,72.45 v1(78.187,70.093) ; v1(57.05,37.575) 57.05,37.602 56.369,38.283 56.369,43.13 56.3,43.199 56.3,47.1 v1(57.175,47.975)
  Bottom Layer w0.5: C30.2@54.55,52.2 54.6,52.2 55.282,52.882 ; v1(57.175,47.975) 57.348,48.148 LDO2.1@57.348,49.861 57.344,49.865 55.964,49.865 55.282,50.547 55.282,52.882 ; C27.2@57.6,61.3 C27.2@57.6,61.3 57.348,61.05 LDO1.1@57.348,58.961 57.348,56.255 56.099,55.006 56.099,53.699 55.282,52.882
  other v1: 34.807,30.993 78.187,73.993
GND: C1.1 C2.1 C3.1 C4.1 C5.1 C7.1 C8.1 C9.1 C10.1 C11.1 C12.1 C13.1 C14.1 C15.1 C16.1 C17.1 C18.1 C19.1 C20.1 C21.1 C22.1 C23.1 C24.1 C25.1 C26.1 C27.1 C28.1 C29.1 C30.1 C31.1 C32.1 C33.1 C34.1 C35.1 C36.2 C37.1 C38.1 CAN1.2 CAN1.8 D1.3 D1.8 D1.9 D2.2 D2.4 D2.6 D2.7 D3.A1 D3.C5 D3.E1 D3.E3 D4.6 D4.7 D.6 D.S1 D.S2 HL3.2 LDO1.2 LDO2.2 P.6 R14.1 R17.2 R25.2 R34.1 R36.2 R37.2 R47.2 R48.2 R49.2 R50.2 R51.2 R52.2 R53.2 R54.2 TYPE-C.A1_B12 TYPE-C.B1_A12 U1.4 U2.6 U2.7 U3.9 U3.11 U4.16 U4.38 U4.51 U4.61 U4.83 U4.94 U4.107 U4.120 U4.130 XP1_1.37 XP1_1.38 XP1_1.39 XP1_1.40 XP1_2.37 XP1_2.38 XP1_2.39 XP1_2.40 XP2_1.1 XP2_1.2 XP2_1.3 XP2_1.4 XP2_1.5 XP2_1.6 XP2_1.37 XP2_1.38 XP2_1.39 XP2_1.40 XP2_2.1 XP2_2.2 XP2_2.3 XP2_2.4 XP2_2.5 XP2_2.6 XP2_2.37 XP2_2.38 XP2_2.39 XP2_2.40 XP3_1.1 XP3_1.2 XP3_1.3 XP3_1.4 XP3_1.35 XP3_1.36 XP3_1.37 XP3_1.38 XP3_1.39 XP3_1.40 XP3_2.1 XP3_2.2 XP3_2.3 XP3_2.4 XP3_2.35 XP3_2.36 XP3_2.37 XP3_2.38 XP3_2.39 XP3_2.40 XP4_1.1 XP4_1.2 XP4_1.3 XP4_1.4 XP4_2.1 XP4_2.2 XP4_2.3 XP4_2.4 | length 5.1
  Top Layer w0.5: C20.1@39.625,42.975 C20.1@39.625,43.025
  Bottom Layer w0.125: D3.C5@77.895,54.07 78.254,54.07 cw(c78.259,53.945) 78.26,54.07 78.306,54.07 78.34,54.04 cw(c78.259,53.945) 78.354,54.026 78.379,53.997 78.383,53.959 cw(c78.259,53.945) 78.384,53.945 D3.E3@78.384,53.516 ; D3.E3@78.4,53.5 78.4,53.114 78.613,52.902 78.613,52.498 78.581,52.467 78.581,52.363 78.625,52.32 78.625,52.275 ; D3.A1@78.973,54.635 78.973,54.656 79.75,55.433 v1(79.75,55.45)
  Bottom Layer w0.3: U2.7@70.304,53.061 70.375,53.061 U2.6@70.758,53.061 ; U2.6@70.839,53.054 v1@70.839,53.508
  Bottom Layer w0.5: U2.7@70.375,53.025 70.375,53.061 70.375,53.186 70.721,53.533 v1(70.721,53.56)
  other v1: 53.857,30.993 55.127,30.993 57.867,30.993 59.137,30.993 79.457,30.993 80.727,30.993 81.997,30.993 53.857,34.893 55.127,34.893 57.867,34.893 59.137,34.893 79.457,34.893 80.727,34.893 81.997,34.893 46.462,39.371 64.018,41.743 41.462,43.371 64.85,45.65 71.65,47.15 50.612,47.496 69.025,51.075 75.275,51.325 79.534,52.317 74.549,52.577 61.325,52.6 75.275,56.675 61.737,57.846 45.937,58.396 39.95,60.446 70.925,60.75 49.225,62.9 56.995,63.205 53.112,63.346 46.005,64.146 53.857,70.05 55.127,70.05 57.867,70.05 59.137,70.05 30.997,70.093 32.267,70.093 30.997,73.993 32.267,73.993 33.537,73.993 53.857,73.993 55.127,73.993 57.867,73.993 59.137,73.993
NetC1_2: C1.2 CAN1.5 R1.2 R2.2 | length 6.9
  Top Layer w0.125: CAN1.5@64.064,37.995 64.788,37.995 66.018,39.225 R2.2@66.8,39.225 68.575,39.225 R1.2@68.6,39.2 70.35,39.2 C1.2@70.4,39.25
NetC5_2: C5.2 U3.10 | length 3.6
  Top Layer w0.125: U3.10@75.45,53.7 75.4,53.7 75.212,53.512 75.183,53.512 75.087,53.417 75.087,52.983 76.308,51.763 76.663,51.763 C5.2@77.1,51.325
NetC6_1: C6.1 U3.12 | length 4.3
  Top Layer w0.125: C6.1@75.275,58.3 75.225,58.3 74.562,57.637 74.562,56.108 75.312,55.358 75.312,54.788 75.4,54.7 U3.12@75.45,54.7
NetC6_2: C6.2 U3.8 | length 29.8
  Top Layer w0.125: C6.2@73.575,58.3 73.625,58.3 74.062,58.737 74.062,58.787 74.825,59.55 74.825,64.975 75.25,65.4 79.175,65.4 80.338,64.237 80.338,54.037 79.877,54.037 79.827,53.987 79.012,53.987 78.688,53.663 78.688,53.307 78.613,53.232 78.613,52.338 78.45,52.175 76.395,52.175 76.112,52.458 76.112,52.488 75.925,52.675 U3.8@75.925,52.725
NetC7_2: C7.2 U4.24 Y1.2 | length 6.5
  Top Layer w0.125: Y1.2@54.75,40.7 55.413,41.363 56.463,41.363 C7.2@56.9,41.8 56.9,41.85 56.463,42.288 55.28,42.288 55.207,42.361 55.207,43.125 55.28,43.198 U4.24@55.28,44.28
NetC8_2: C8.2 U4.23 Y1.1 | length 9.7
  Top Layer w0.125: C8.2@48.3,41.8 49.562,41.8 Y1.1@50.45,40.913 ; Y1.1@50.45,40.7 Y1.1@50.45,40.913 ; U4.23@54.78,44.28 54.78,42.313 54.629,42.162 53.733,42.162 53.638,42.067 53.638,42.011 53.564,41.937 51.337,41.937 50.45,41.05 Y1.1@50.45,40.913
NetC26_2: C26.2 R18.2 U4.32 | length 4.1
  Top Layer w0.125: v1(59.173,43.222) 59.227,43.275 59.227,44.227 U4.32@59.28,44.28
  Bottom Layer w0.125: C26.2@57.8,41.9 59.35,41.9 R18.2@59.4,41.95 59.387,41.963 59.387,42.88 59.173,43.093 v1(59.173,43.222)
NetC34_2: C34.2 D4.5 R42.1 | length 11.6
  Bottom Layer w0.125: R42.1@71.7,48.125 C34.2@71.7,49.725 72.375,49.725 72.612,49.488 72.612,47.727 72.74,47.6 73.629,47.6 74.097,48.068 74.097,48.967 74.562,49.433 74.562,51.892 74.658,51.988 74.989,51.988 75.026,52.024 75.062,52.061 D4.5@75.062,52.987
NetC35_2: C35.2 D4.8 | length 4.2
  Bottom Layer w0.125: D4.8@73.4,53.15 73.513,53.15 73.575,53.088 73.575,52.605 74.288,51.892 74.288,50.388 73.625,49.725 C35.2@73.575,49.725
NetCAN1_1: CAN1.1 U4.74 | length 31.2
  Top Layer w0.125: CAN1.1@59.136,41.805 59.86,41.805 60.064,41.601 60.064,41.448 61.025,40.487 v1(61.025,39) ; v1(60.275,63.85) 60.351,63.85 60.78,64.279 U4.74@60.78,65.62
  Layer 2 w0.125: v1(60.275,63.85) 60.275,39.75 v1(61.025,39)
NetCAN1_4: CAN1.4 U4.73 | length 30.2
  Top Layer w0.125: CAN1.4@59.136,37.995 61.045,37.995 v1@61.05,38 ; v1(61.275,64.125) 61.277,64.127 61.277,65.617 U4.73@61.28,65.62
  Layer 2 w0.125: v1(61.05,38) 61.513,38.462 61.513,39.201 61.35,39.365 61.35,51.143 60.775,51.718 60.775,63.625 v1(61.275,64.125)
NetCAN1_6: CAN1.6 R2.1 XP2_1.26 XP2_2.26 | length 87.4
  Top Layer w0.125: v1(65.75,40.1) 65.623,40.1 64.788,39.265 CAN1.6@64.064,39.265 64.064,38.811 63.823,38.57 63.152,38.57 62.911,38.329 62.911,37.661 63.006,37.566 66.759,37.566 R2.1@66.8,37.525
  Bottom Layer w0.125: v1(46.237,73.993) 46.237,73.622 46.077,73.462 45.487,73.462 44.14,72.115 40.85,72.115 39.15,70.415 39.15,67.775 37.63,66.255 37.63,55.074 38.238,54.466 38.238,50.373 37.862,49.997 37.862,34.213 38,34.075 63.18,34.075 63.725,34.62 63.725,38.85 64.725,39.85 65.5,39.85 v1(65.75,40.1)
NetCAN1_7: CAN1.7 R1.1 XP2_1.24 XP2_2.24 | length 94.7
  Top Layer w0.125: v1(66.75,40.425) 66.621,40.425 66.459,40.588 64.116,40.588 CAN1.7@64.064,40.535 63.34,40.535 63.136,40.331 63.136,39.824 62.911,39.599 62.911,38.703 62.661,38.453 62.661,37.557 63.406,36.812 67.963,36.812 68.6,37.45 R1.1@68.6,37.5
  Bottom Layer w0.125: v1(44.967,73.993) 44.967,73.622 44.807,73.462 44.217,73.462 43.12,72.365 39.83,72.365 38.05,70.585 38.05,67.029 37.212,66.191 37.212,45.088 37.344,44.956 37.344,37.341 36.859,36.856 36.859,34.048 37.082,33.825 64.475,33.825 64.7,34.05 64.7,39.05 65.237,39.587 65.926,39.587 66.238,39.898 66.238,39.913 v1(66.75,40.425)
NetD1_2: D1.2 R8.2 | length 7.9
  Top Layer w0.125: R8.2@74.75,40.725 74.9,40.875 80.275,40.875 80.363,40.787 80.363,38.748 D1.2@80.29,38.675
NetD1_4: D1.4 R9.2 | length 5.1
  Top Layer w0.125: R9.2@74.8,39.125 75.496,39.125 75.914,39.542 79.258,39.542 79.363,39.438 79.363,39.367 79.525,39.205 D1.4@79.525,39.19
NetD1_5: D1.5 R10.2 | length 5.3
  Top Layer w0.125: R10.2@74.8,37.525 74.85,37.525 75.725,38.4 75.725,39 75.915,39.19 D1.5@79.025,39.19
NetD1_6: D1.6 U4.49 | length 33.9
  Top Layer w0.125: U4.49@63.2,52.2 63.219,52.181 64.478,52.181 v1(64.496,52.163) ; v1@76.55,38.65 76.575,38.675 D1.6@78.76,38.675
  Layer 1 w0.125: v1(62.075,38.95) 62.375,38.65 v1(76.55,38.65)
  Layer 2 w0.125: v1(62.075,38.95) 62,39.025 62,52.152 62.073,52.225 64.434,52.225 v1(64.496,52.163)
NetD1_7: D1.7 U4.125 | length 65.1
  Top Layer w0.125: v1(40.075,55.7) U4.125@41.86,55.7 ; v1@77.25,37.875 77.55,38.175 D1.7@78.76,38.175
  Layer 1 w0.125: v1(36.857,37.543) 37.425,36.975 68.267,36.975 69.166,37.875 v1(77.25,37.875)
  Layer 2 w0.125: v1(36.857,37.543) 36.888,37.574 36.888,41.819 37.063,41.994 37.063,48.513 37.7,49.15 38.657,49.15 38.67,49.137 39.637,49.137 39.863,49.363 39.863,52.361 40.075,52.573 v1(40.075,55.7)
NetD2_1: D2.1 U4.92 | length 29.5
  Top Layer w0.125: U4.92@51.78,65.62 51.78,64.609 51.838,64.552 51.838,55.197 51.911,55.124 v1(55.227,55.124) ; v1(69.838,55.25) 69.966,55.25 70.122,55.094 70.454,55.094 D2.1@70.475,55.115
  Layer 1 w0.125: v1@55.225,55.1 55.231,55.094 66.141,55.094 66.447,54.787 69.375,54.787 v1(69.838,55.25)
NetD2_5: D2.5 U4.50 | length 12
  Top Layer w0.125: U4.50@63.2,52.7 63.25,52.65 65.025,52.65 v1(65.075,52.6) ; v1(72.335,55.793) 72.405,55.723 72.405,55.185 D2.5@72.475,55.115
  Layer 2 w0.125: v1(65.075,52.6) 65.075,53.933 66.935,55.793 v1(72.335,55.793)
NetD2_8: D2.8 R11.2 | length 4.7
  Top Layer w0.125: R11.2@73.575,49.725 73.625,49.725 74.288,50.388 74.288,51.914 73.89,52.311 D2.8@73.89,53.95
NetD2_9: D2.9 R13.2 | length 4.5
  Top Layer w0.125: R13.2@71.7,49.725 71.871,49.554 72.539,49.554 72.612,49.627 72.612,50.635 72.725,50.747 72.725,51.658 72.863,51.796 72.863,51.892 73.362,52.392 73.362,52.673 D2.9@73.475,52.785
NetD2_10: D2.10 D2.15 R12.1 | length 7.3
  Top Layer w0.125: D2.15@70.475,52.785 70.419,52.729 69.39,52.729 69.104,52.444 69.104,51.825 69.319,51.825 69.406,51.738 70.936,51.738 71.161,51.513 71.263,51.513 R12.1@71.7,51.075 72.138,51.513 72.226,51.513 72.573,51.86 72.573,51.956 72.919,52.303 72.919,52.729 D2.10@72.975,52.785
NetD2_12: D2.12 U4.91 | length 35.9
  Top Layer w0.125: U4.91@52.28,65.62 52.28,55.685 52.353,55.612 55.429,55.612 55.957,55.083 55.957,51.217 56.026,51.148 56.026,50.758 v1(56.117,50.667) ; D2.12@71.975,52.785 72.03,52.73 72.03,52.117 v1(72.086,52.062)
  Layer 1 w0.125: v1(56.117,50.667) 56.208,50.576 56.58,50.576 56.667,50.489 63.18,50.489 63.332,50.337 70.39,50.337 72.086,52.033 v1(72.086,52.062)
NetD2_13: D2.13 U4.90 | length 34.5
  Top Layer w0.125: U4.90@52.78,65.62 52.78,65.025 52.702,64.947 52.656,64.947 52.583,64.874 52.583,64.838 52.53,64.786 52.53,56.47 53,56 55.825,56 56.728,55.097 v1(56.728,51.058) ; v1(71.363,52) 71.419,52.056 71.419,52.729 D2.13@71.475,52.785
  Layer 1 w0.125: v1(56.728,51.058) 56.819,50.967 57.211,50.967 57.278,50.9 63.348,50.9 63.66,50.587 70.202,50.587 71.272,51.658 71.272,51.909 v1(71.363,52)
NetD2_14: D2.14 U4.53 | length 10.1
  Top Layer w0.125: U4.53@63.2,54.2 65.652,54.2 65.725,54.127 65.725,52.539 v1(65.789,52.475) ; v1(69.592,52.242) 69.683,52.151 70.035,52.151 70.142,52.044 70.434,52.044 70.863,52.473 70.863,52.673 D2.14@70.975,52.785
  Layer 1 w0.125: v1(65.789,52.475) 65.854,52.475 66.213,52.116 67.775,52.116 67.901,52.242 v1(69.592,52.242)
NetD2_16: D2.16 U4.93 | length 35.9
  Top Layer w0.125: U4.93@51.28,65.62 51.28,66.605 v1(51.7,67.025) ; v1@69.675,64.65 69.261,64.65 69.188,64.577 69.188,55.972 69.315,55.845 69.315,55.084 69.828,54.571 69.828,54.063 69.94,53.95 D2.16@70.06,53.95
  Layer 1 w0.125: v1(51.7,67.025) 51.7,65.377 52.65,64.427 52.65,64.036 52.818,63.868 53.357,63.868 53.704,63.521 53.704,63.417 53.688,63.401 53.688,62.998 53.974,62.712 54.472,62.712 54.762,63.002 54.762,63.712 55.975,64.925 62.621,64.925 62.914,64.632 v1(69.689,64.632)
NetD3_A3: D3.A3 R22.2 | length 10.6
  Bottom Layer w0.125: D3.A3@78.4,54.632 78.4,55.139 78.473,55.212 79.162,55.212 79.262,55.312 79.262,55.652 79.337,55.726 79.337,55.912 79.411,55.986 80.039,55.986 80.311,55.714 80.311,49.811 80.225,49.725 R22.2@78.8,49.725
NetD3_A5: D3.A5 U4.55 | length 28
  Top Layer w0.125: U4.55@63.2,55.2 65.175,55.2 v1@65.575,55.6
  Layer 1 w0.125: v1(65.589,55.582) 68.262,55.582 68.443,55.763 70.227,55.763 70.3,55.836 70.3,61.402 70.373,61.475 73.7,61.475 74.7,60.475 74.7,56.075 75.225,55.55 76.025,55.55 77.175,54.4 v1(77.175,53.5)
  Bottom Layer w0.125: v1(77.175,53.5) 77.125,53.55 77.125,54.525 77.232,54.632 D3.A5@77.834,54.632
NetD3_B4: D3.B4 R23.2 | length 2.8
  Bottom Layer w0.125: R23.2@77.15,56.675 77.2,56.675 78.117,55.758 D3.B4@78.117,54.349
NetD3_C1: D3.C1 R24.1 | length 6.9
  Bottom Layer w0.125: R24.1@78.8,51.325 78.8,50.461 78.873,50.388 79.738,50.388 79.861,50.264 79.964,50.264 80.061,50.361 80.061,53.795 79.987,53.869 79.175,53.869 78.978,54.066 D3.C1@78.966,54.066
NetD3_D2: D3.D2 U4.89 | length 53.2
  Top Layer w0.125: v1@53.275,64.4 53.28,64.405 U4.89@53.28,65.62
  Layer 1 w0.125: v1(53.275,64.4) 53.275,64.31 53.848,63.737 54.262,63.737 55.8,65.275 66.4,65.275 68.125,67 81.25,67 v1(81.425,66.825)
  Layer 2 w0.125: v1(79.1,52.985) 79.075,53.01 79.075,53.627 78.925,53.777 78.925,54.45 77.463,55.912 77.463,57.938 77.5,57.975 78.502,57.975 78.575,57.902 78.575,57.668 80.055,56.188 81.352,56.188 81.425,56.261 81.425,58.048 ; 81.425,58.048 v1(81.425,66.825)
  Bottom Layer w0.125: D3.D2@78.683,53.783 78.683,53.402 v1(79.1,52.985)
NetD4_1: D4.1 R41.2 | length 7.4
  Bottom Layer w0.125: D4.1@75.725,54.65 75.725,55.845 76.187,56.308 76.187,57.346 76.437,57.596 76.437,58.867 76.533,58.963 77.815,58.963 ; 77.815,58.915 77.862,58.867 77.862,58.55 78.113,58.3 R41.2@78.85,58.3
NetD4_4: D4.4 U4.88 | length 49.2
  Top Layer w0.125: U4.88@53.78,65.62 53.78,64.624 54.05,64.354 v1(54.05,64.225) ; v1(65.588,65.763) 65.5,65.675 65.5,59.18 67.24,57.441 67.24,54.176 67.237,54.174 67.237,46.915 66.925,46.603 v1(66.925,46.537)
  Layer 1 w0.125: v1(54.05,64.225) 54.708,64.883 54.708,65.083 55.388,65.763 v1(65.588,65.763) ; v1(66.925,46.537) 67.275,46.188 69.954,46.188 70.116,46.025 73.004,46.025 74.362,47.384 v1(74.362,47.47)
  Bottom Layer w0.125: v1(74.362,47.47) 74.453,47.561 74.453,48.101 74.546,48.194 74.546,48.629 74.978,49.061 75.891,49.061 75.988,49.158 75.988,51.892 75.725,52.155 D4.4@75.725,53.15
NetD4_9: D4.9 U4.132 | length 35.1
  Top Layer w0.125: U4.132@41.86,52.2 41.869,52.191 46.741,52.191 v1(47.175,52.625)
  Layer 1 w0.125: v1(47.175,52.625) 47.638,53.088 65.866,53.088 66.131,52.822 71.838,52.822 72.728,53.712 73.523,53.712 73.685,53.875 v1(74.65,53.875)
  Bottom Layer w0.125: D4.9@73.4,53.65 74.475,53.65 74.65,53.825 v1(74.65,53.875)
NetD4_12: D4.12 R38.1 U4.22 | length 47.1
  Top Layer w0.125: U4.22@54.28,44.28 54.28,44.875 55.005,45.6 v1(55.4,45.6)
  Layer 1 w0.125: v1(55.4,45.6) 56.787,46.987 62.896,46.987 62.933,47.025 68.913,47.025 69.5,46.438 70.057,46.438 70.22,46.275 72.9,46.275 73.875,47.25 73.875,48.021 74.097,48.243 74.097,49.274 73.475,49.896 73.475,52.017 73.548,52.09 75.19,52.09 75.85,52.75 75.85,54.796 75.421,55.225 74.423,55.225 74.35,55.298 74.35,57.48 74.384,57.514 74.384,59.916 73.95,60.35 v1(72.75,60.351)
  Bottom Layer w0.125: v1(72.75,60.351) 72.405,60.007 71.832,60.007 R38.1@71.7,59.875 71.75,59.875 72.612,59.012 72.612,56.358 73.198,55.773 73.215,55.773 74.062,54.925 D4.12@74.062,54.812
NetD4_13: D4.13 R39.2 | length 3.9
  Bottom Layer w0.125: R39.2@73.575,58.3 73.625,58.3 74.288,57.637 74.288,55.2 74.563,54.925 D4.13@74.563,54.812
NetD4_14: D4.14 R40.2 | length 7
  Bottom Layer w0.125: D4.14@75.062,54.812 75.062,55.608 74.562,56.108 74.562,57.242 74.808,57.488 75.838,57.488 76.15,57.8 76.15,58.933 76.654,59.437 76.712,59.437 R40.2@77.15,59.875
NetD_1: D.1 R31.2 U4.101 | length 35.8
  Top Layer w0.125: R31.2@41.6,39.35 41.425,39.525 41.613,39.713 v1(41.613,41.925) ; U4.101@47.28,65.62 47.28,64.253 47.05,64.023 47.05,62.178 47.464,61.764 v1(47.464,60.664)
  Bottom Layer w0.125: v1(41.613,41.925) 40.148,41.925 40.075,41.998 40.075,45.3 41.425,46.65 41.425,49 42.675,50.25 D.1@43.125,50.25 43.125,50.945 42.938,51.133 42.938,52.367 43.308,52.737 44.028,52.737 45.551,51.214 46.548,51.214 46.687,51.354 46.687,53.406 47.03,53.748 47.03,60.366 47.118,60.454 47.126,60.454 47.336,60.664 v1(47.464,60.664)
NetD_2: D.2 R32.2 | length 14.8
  Top Layer w0.125: v1(39.847,40.547) 39.847,39.503 R32.2@40,39.35
  Bottom Layer w0.125: v1(39.847,40.547) 39.878,40.578 40.488,40.578 40.598,40.689 41.214,40.689 42.1,41.575 42.1,42.4 41.962,42.538 40.565,42.538 40.427,42.677 40.45,42.7 40.45,45 41.875,46.425 42.1,46.425 42.1,49.077 42.173,49.15 D.2@43.125,49.15
NetD_3: D.3 U4.42 | length 27.1
  Top Layer w0.125: v1(58.975,49.325) 61.98,49.325 62.605,48.7 U4.42@63.2,48.7
  Layer 2 w0.125: v1(45.263,48.8) 46.388,49.925 51.025,49.925 51.212,50.112 51.212,52.752 51.498,53.038 51.902,53.038 52.188,52.752 52.188,50.273 52.261,50.2 55.364,50.2 56.439,49.125 58.664,49.125 58.864,49.325 v1(58.975,49.325)
  Bottom Layer w0.125: D.3@43.125,48.05 43.575,48.05 44.35,48.825 45.238,48.825 v1(45.263,48.8)
NetD_5: D.5 U4.48 | length 31.3
  Top Layer w0.125: U4.48@63.2,51.7 63.225,51.675 66.197,51.675 66.286,51.587 66.286,51.543 66.5,51.329 v1(66.5,51.2)
  Layer 1 w0.125: v1(45.688,46.226) 48.787,49.326 48.787,51.529 49.073,51.815 50.746,51.815 51.395,51.166 55.003,51.166 55.382,51.545 58.991,51.545 59.336,51.2 v1(66.5,51.2)
  Bottom Layer w0.125: D.5@43.125,45.85 45.311,45.85 v1(45.688,46.226)
NetD_7: D.7 R29.2 U4.98 | length 33
  Top Layer w0.125: R29.2@44.8,39.35 45.238,39.787 45.187,39.837 v1(45.187,40.529) ; v1(48.734,60.427) 48.734,61.466 48.3,61.9 48.3,63.811 48.25,63.861 48.25,64.077 48.323,64.15 48.461,64.15 48.78,64.469 U4.98@48.78,65.62
  Bottom Layer w0.125: D.7@43.125,43.65 44.075,43.65 ; v1(45.187,40.529) 45.278,40.619 45.278,41.003 45.354,41.079 45.354,42.303 44.715,42.942 44.715,43.01 44.075,43.65 ; v1(48.734,60.427) 47.917,60.427 47.654,60.165 47.375,60.165 47.28,60.069 47.28,53.225 47.663,52.843 47.663,51.675 46.687,50.7 46.687,50.076 47.25,49.514 47.25,44.85 46.05,43.65 44.075,43.65
NetD_8: D.8 R30.2 U4.100 | length 44
  Top Layer w0.125: R30.2@43.2,39.35 43.075,39.475 43.075,41.2 43.2,41.325 44.607,41.325 v1(44.669,41.387) ; U4.100@47.78,65.62 47.78,64.419 47.53,64.169 47.53,64.066 47.3,63.836 47.3,62.282 48.132,61.45 v1(48.132,61.375)
  Bottom Layer w0.125: D.8@43.125,42.55 44.6,42.55 44.725,42.425 v1@44.725,41.381 ; v1(44.669,41.387) 44.7,41.356 44.7,39.623 44.627,39.55 39.925,39.55 39.359,40.116 39.359,40.749 39.824,41.213 39.824,45.671 41.127,46.975 41.127,50.91 42.727,52.511 42.727,56.972 47.181,61.425 48.082,61.425 v1(48.132,61.375)
NetHL1_1: HL1.1 R26.1 | length 1.8
  Top Layer w0.125: R26.1@82.1,59.6 HL1.1@82.1,61.4
NetHL1_2: HL1.2 U4.8 | length 81.7
  Top Layer w0.125: U4.8@47.28,44.28 47.28,43.121 46.8,42.641 46.8,40.248 46.727,40.175 45.9,40.175 45.575,39.85 45.575,38.573 45.728,38.42 46.91,38.42 47.063,38.267 47.063,37.302 48.094,36.271 48.094,34.278 49.709,32.663 55.422,32.663 55.98,32.105 55.98,31.458 v1@56.537,30.9
  Layer 1 w0.125: v1(56.551,30.882) 57.169,31.5 82.25,31.5 82.75,32 82.75,48.635 82.114,49.271 v1(82.114,63.582)
NetHL2_1: HL2.1 R27.1 | length 1.9
  Top Layer w0.125: R27.1@82.1,44.5 HL2.1@82.1,46.4
NetHL2_2: HL2.2 U4.9 | length 62.4
  Top Layer w0.125: U4.9@47.78,44.28 47.78,43.267 47.137,42.624 47.137,38.546 47.313,38.371 47.313,37.662 48.344,36.631 48.344,34.381 49.813,32.913 55.662,32.913 v1@56.6,31.975
  Layer 1 w0.125: v1(56.614,31.957) 81.857,31.957 82.5,32.6 82.5,48.477 82.486,48.491 82.205,48.491 v1(82.114,48.582)
NetHL3_1: HL3.1 R33.1 | length 2.1
  Top Layer w0.125: R33.1@82.1,51.675 HL3.1@82.1,53.775
NetP_2: P.2 R19.1 | length 3
  Top Layer w0.125: P.2@34.5,48.5 34.9,48.5 35.712,49.312 35.712,50.138 R19.1@36.15,50.575
NetP_3: P.3 R20.1 U4.110 XP1_1.31 XP1_2.31 | length 59.6
  Top Layer w0.125: P.3@34.5,47.25 34.9,47.25 36.025,48.375 36.025,49.65 36.238,49.863 37.088,49.863 37.75,50.525 v1(37.75,50.575) ; U4.110@41.86,63.2 42.455,63.2 42.758,63.502 42.758,64.392 v1(42.025,65.125)
  Layer 2 w0.125: v1(42.025,65.125) 39.85,65.125 38.387,63.662 38.387,51.212 v1(37.75,50.575) 36.275,49.099 36.275,43.425 36.813,42.887 36.813,42.098 36.515,41.8 36.211,41.8 35.913,41.501 35.913,37.144 36.575,36.482 37.993,36.482 39.65,34.825 39.65,32.198 39.723,32.125 49.825,32.125 50.1,31.85 50.1,31.047 v1(50.047,30.993)
NetP_4: P.4 R21.1 U4.105 | length 32
  Top Layer w0.125: P.4@34.5,46 34.9,46 36.425,47.525 36.425,49.494 36.498,49.567 38.367,49.567 39.35,50.55 R21.1@39.35,50.6 39.35,50.65 40.25,51.55 40.25,52.883 39.983,53.15 38.898,53.15 38.825,53.223 38.825,61.402 38.898,61.475 40.355,61.475 40.65,61.77 40.65,63.192 40.788,63.329 40.788,64.113 41.125,64.45 41.125,66.325 41.317,66.517 44.978,66.517 45.28,66.215 U4.105@45.28,65.62
NetP_5: P.5 R25.1 U4.109 | length 37.3
  Top Layer w0.125: R25.1@38.1,39.35 38.1,39.4 37.663,39.838 34.233,39.838 33.025,41.045 33.025,44.65 33.125,44.75 34.9,44.75 36.775,46.625 36.775,49.102 36.848,49.175 38.775,49.175 v1@39.3,49.7 ; U4.109@41.86,63.7 41.898,63.7 41.975,63.777 v1(41.975,64.25)
  Layer 2 w0.125: v1(39.325,49.625) 39.363,49.662 39.363,56.561 38.963,56.96 38.963,63.677 39.436,64.15 41.875,64.15 v1(41.975,64.25)